# Altium PCB PCB.PcbDoc (part 1 of 11)
Units mm, origin at the board's own origin, x right, y up, seen from the top; angles counter-clockwise.
Board outline 100.46 x 70.51 mm, 10 copper layers (L1(SIG), L2(GND), L3(PWR), L4(SIG), L5(GND), L6(SIG), L7(GND), L8(SIG), L9(GND), L10(SIG)), stack 1.49 mm thick; 425 components, 324 nets, 2004 pads, 1425 vias.
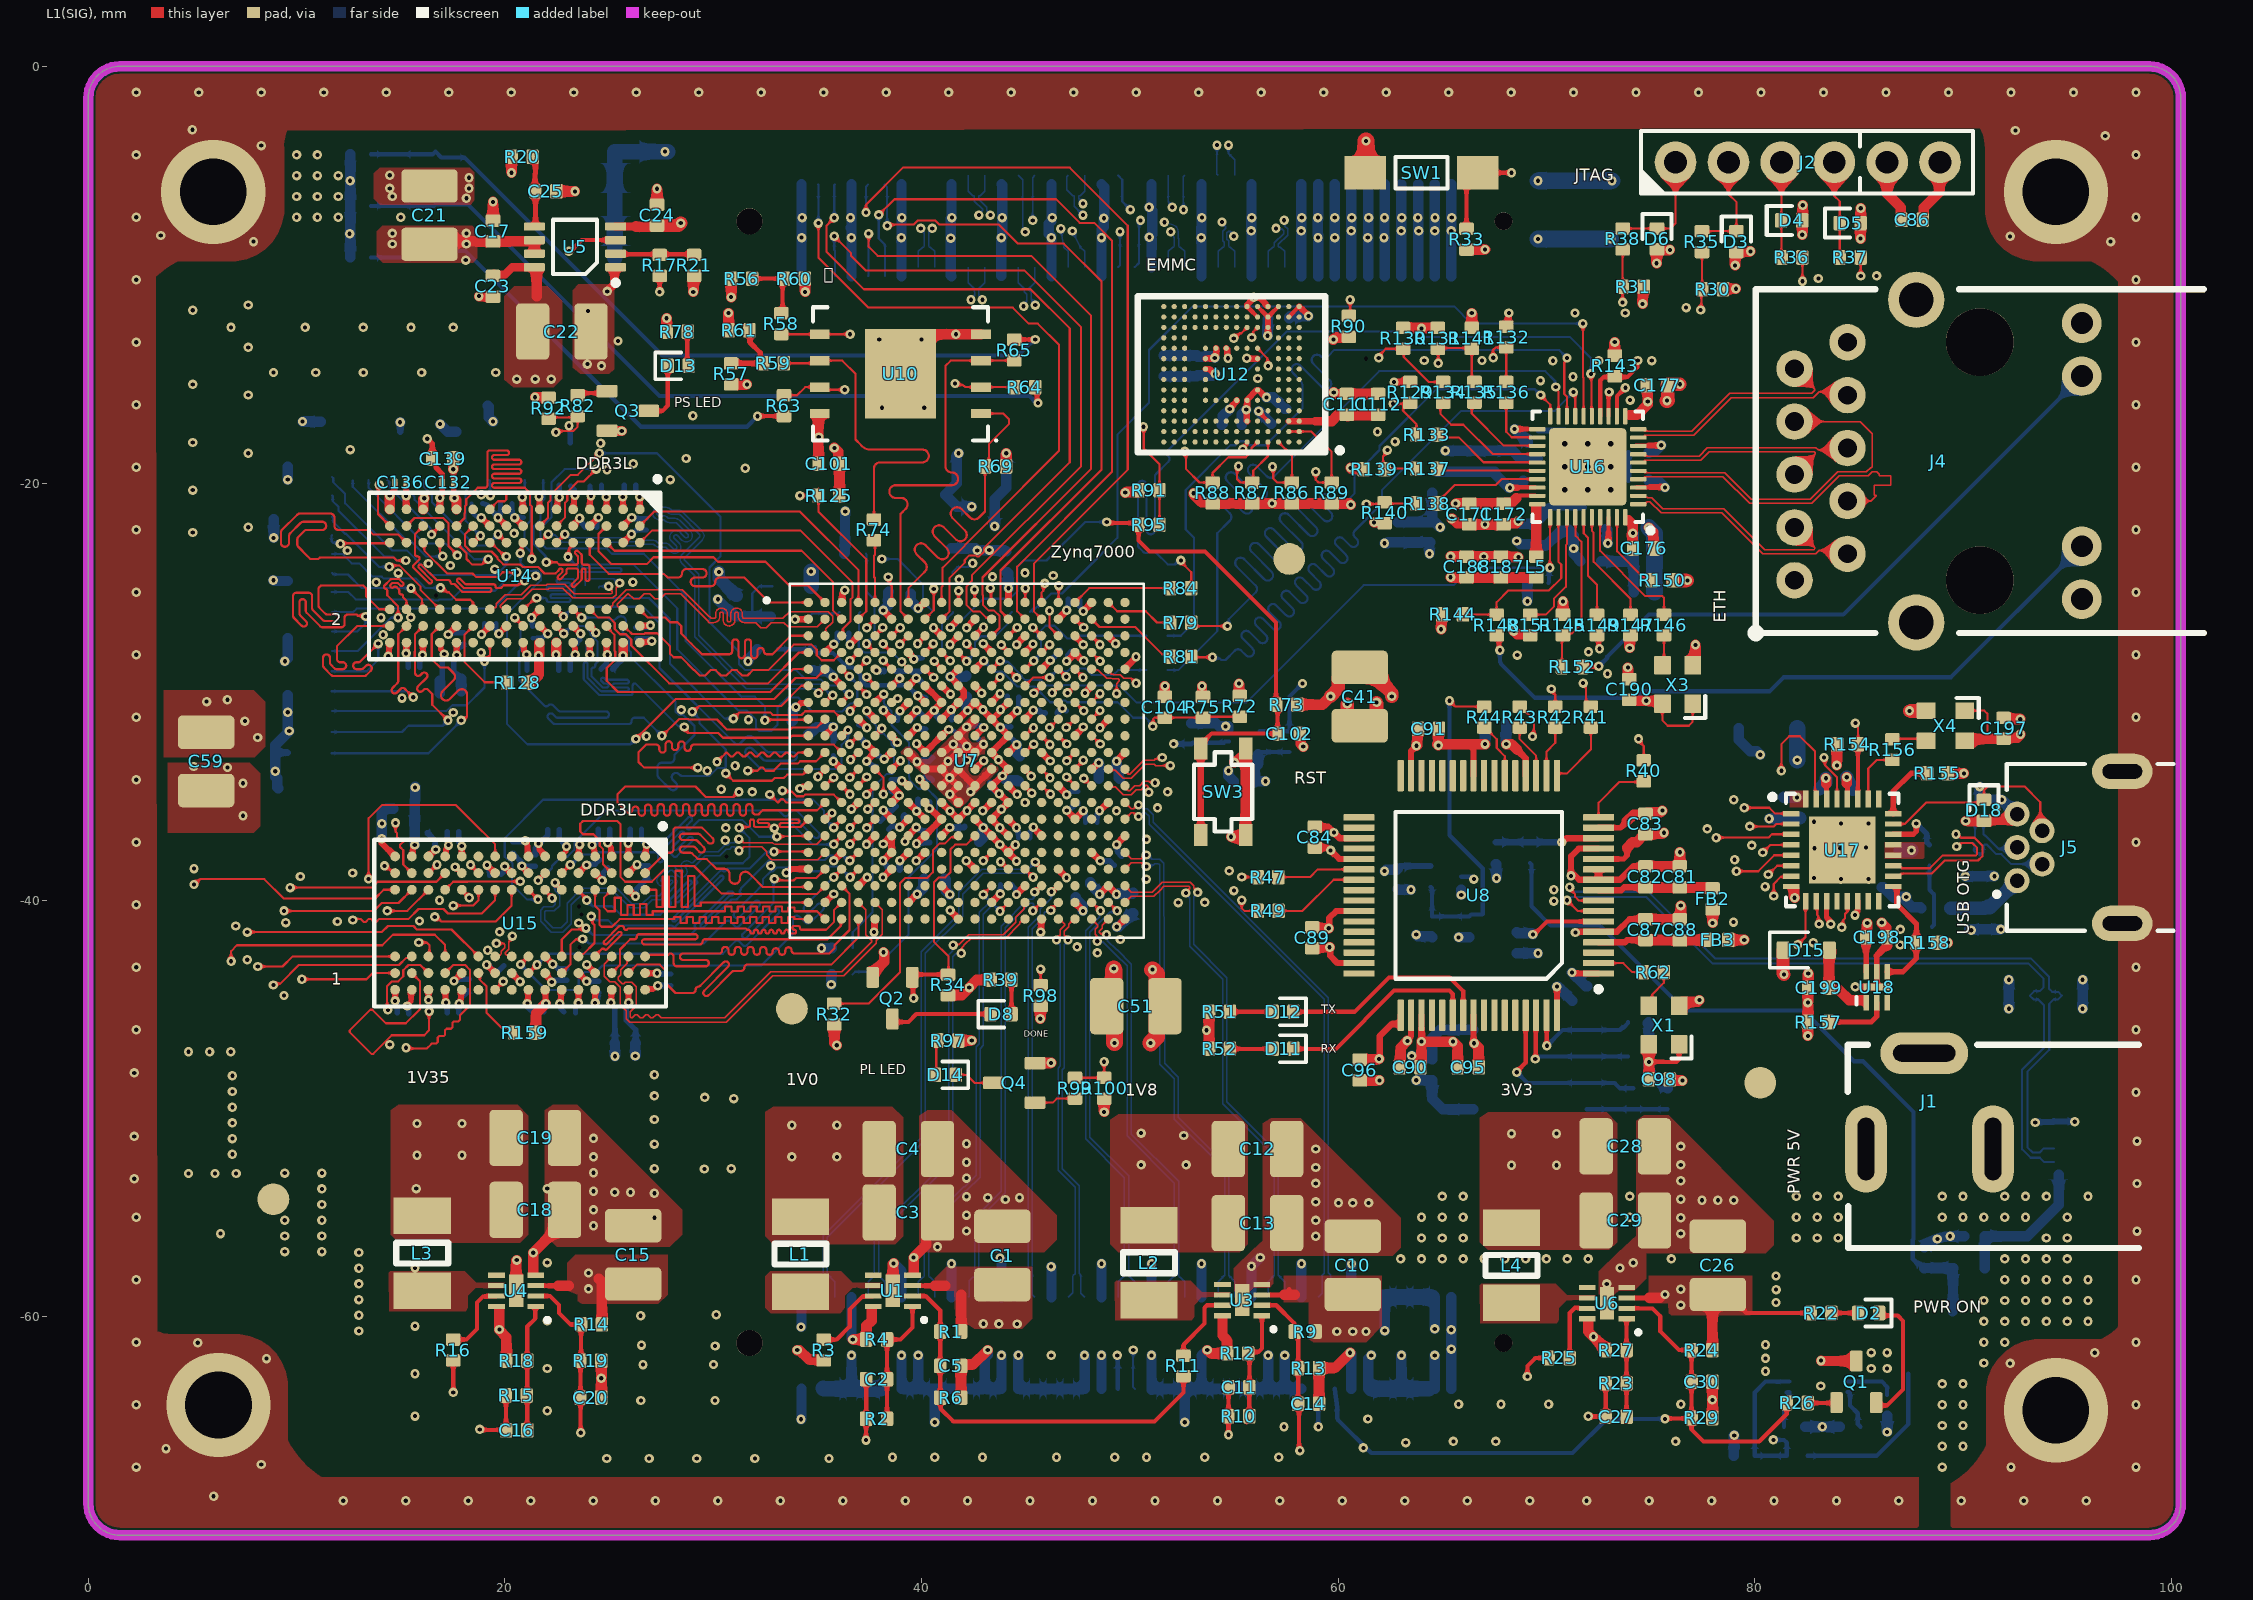
[diagram p0: L1(SIG) view]
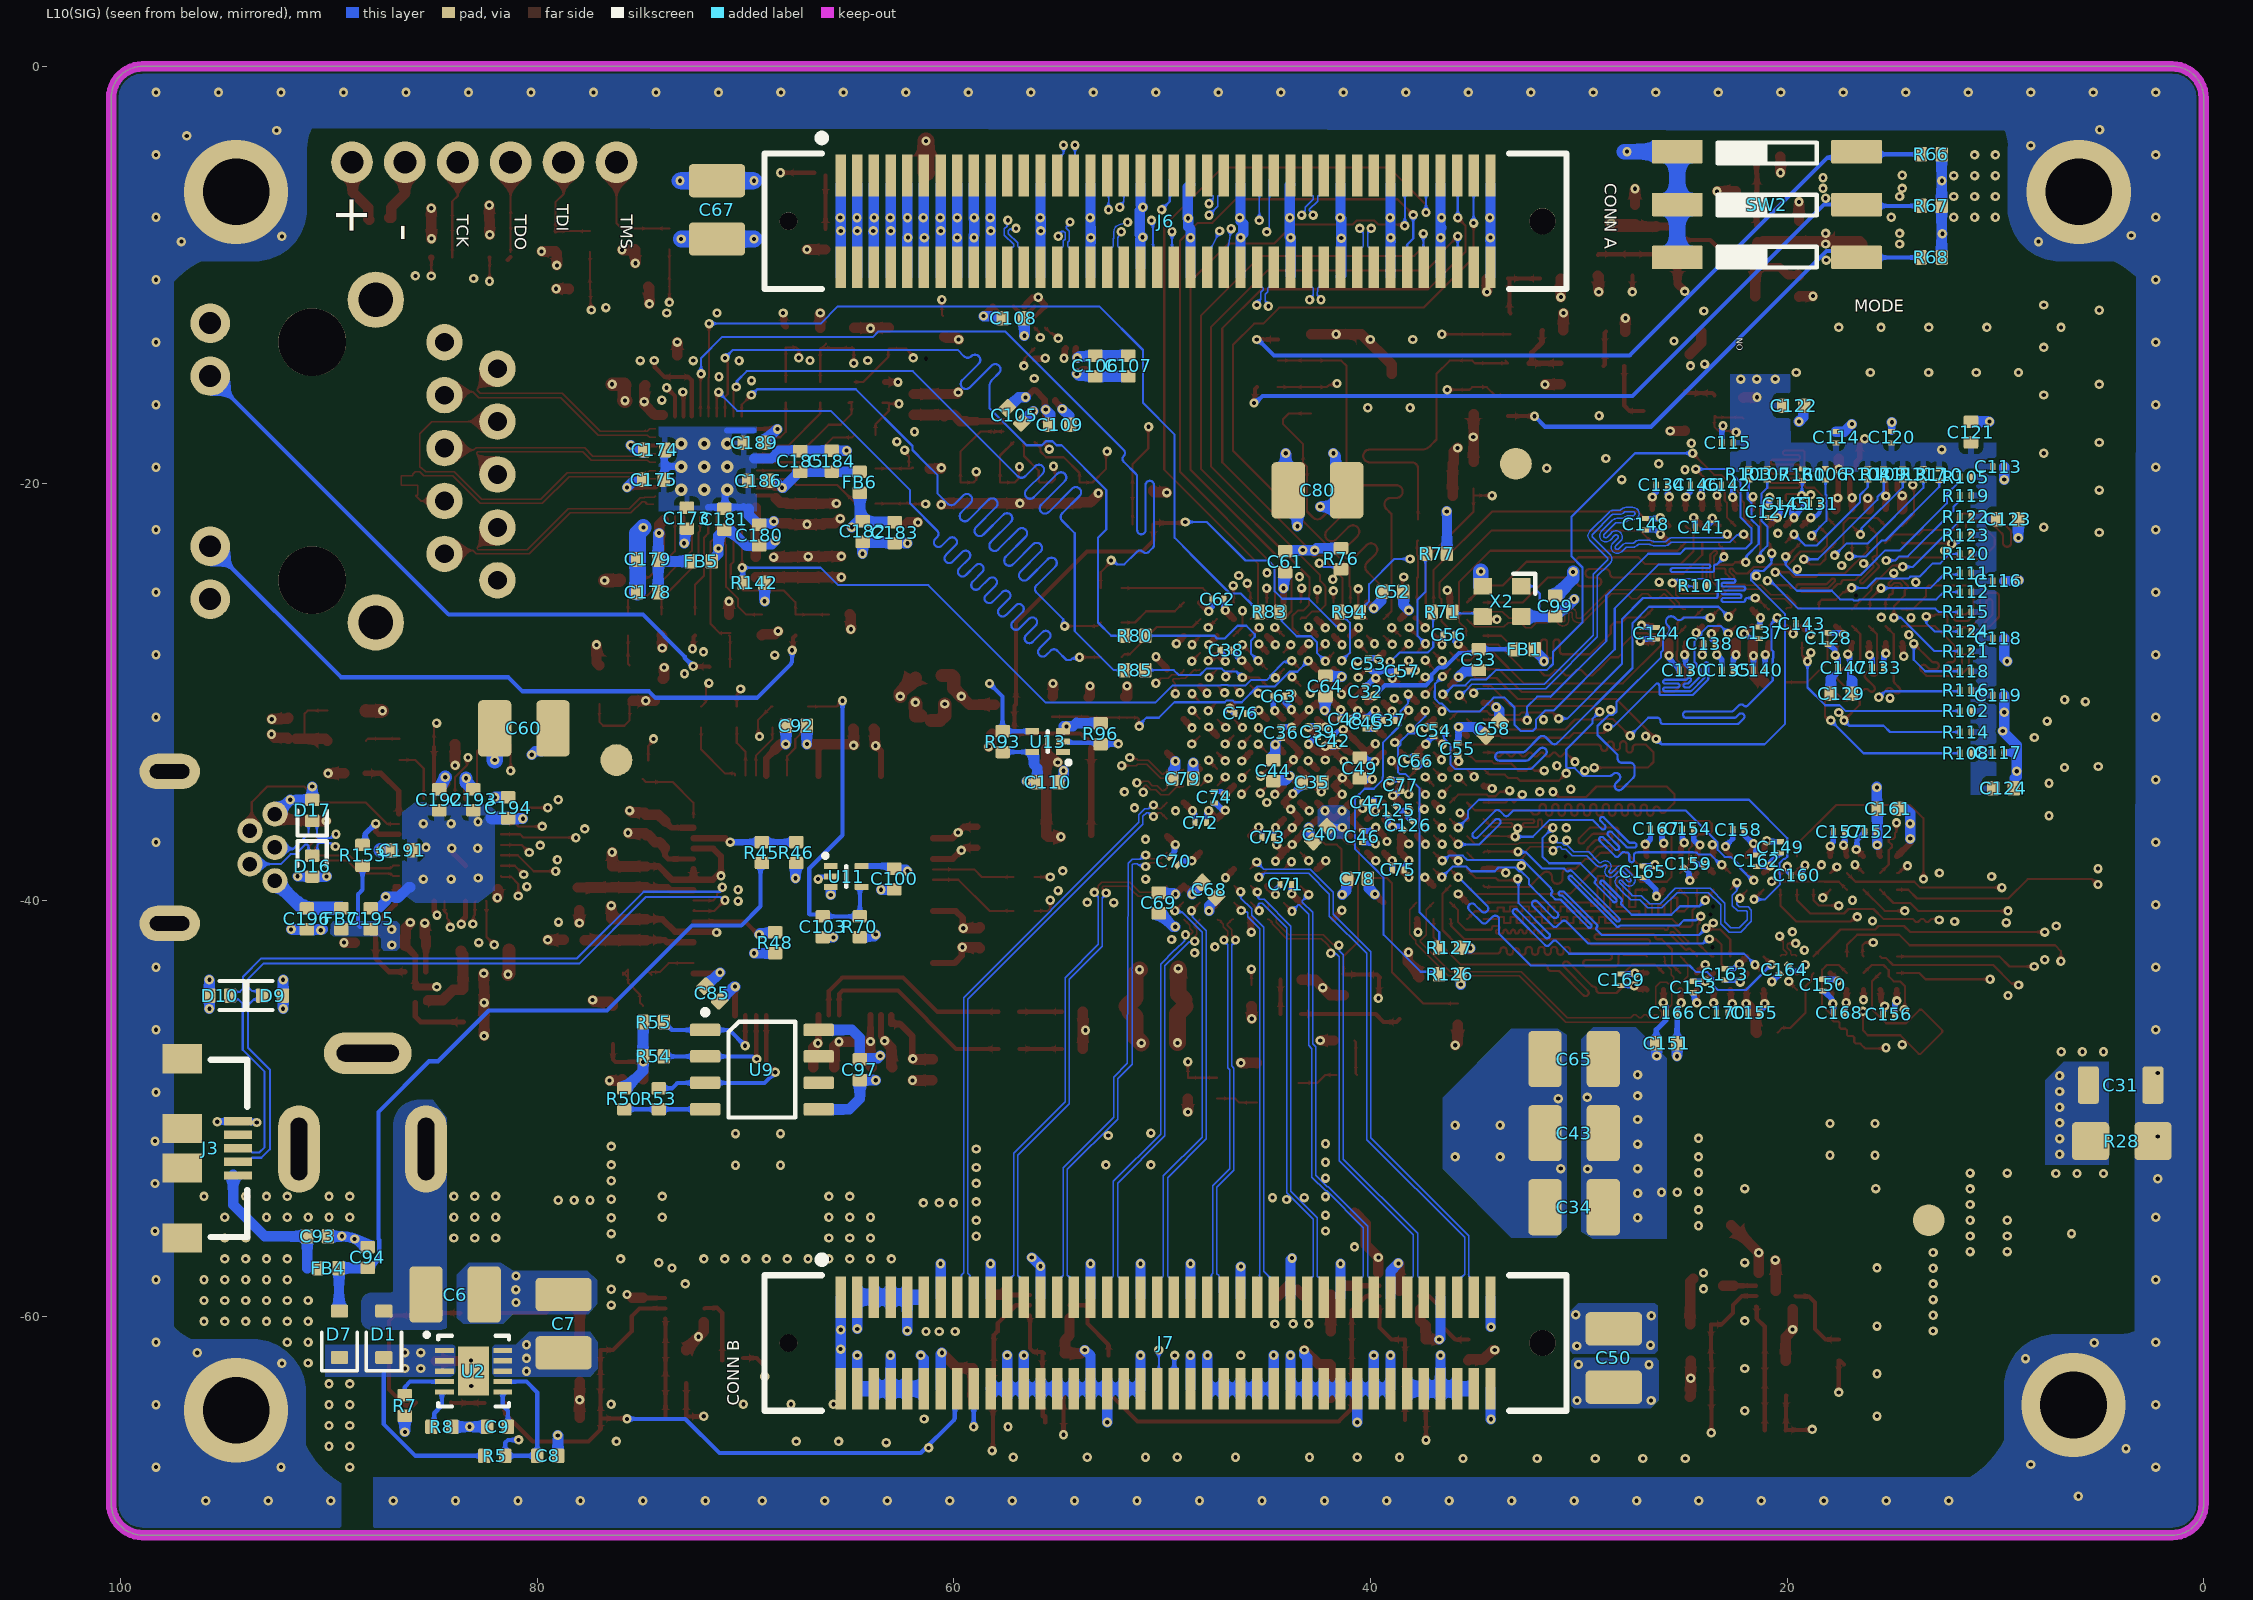
[diagram p1: L10(SIG) view, seen from below]
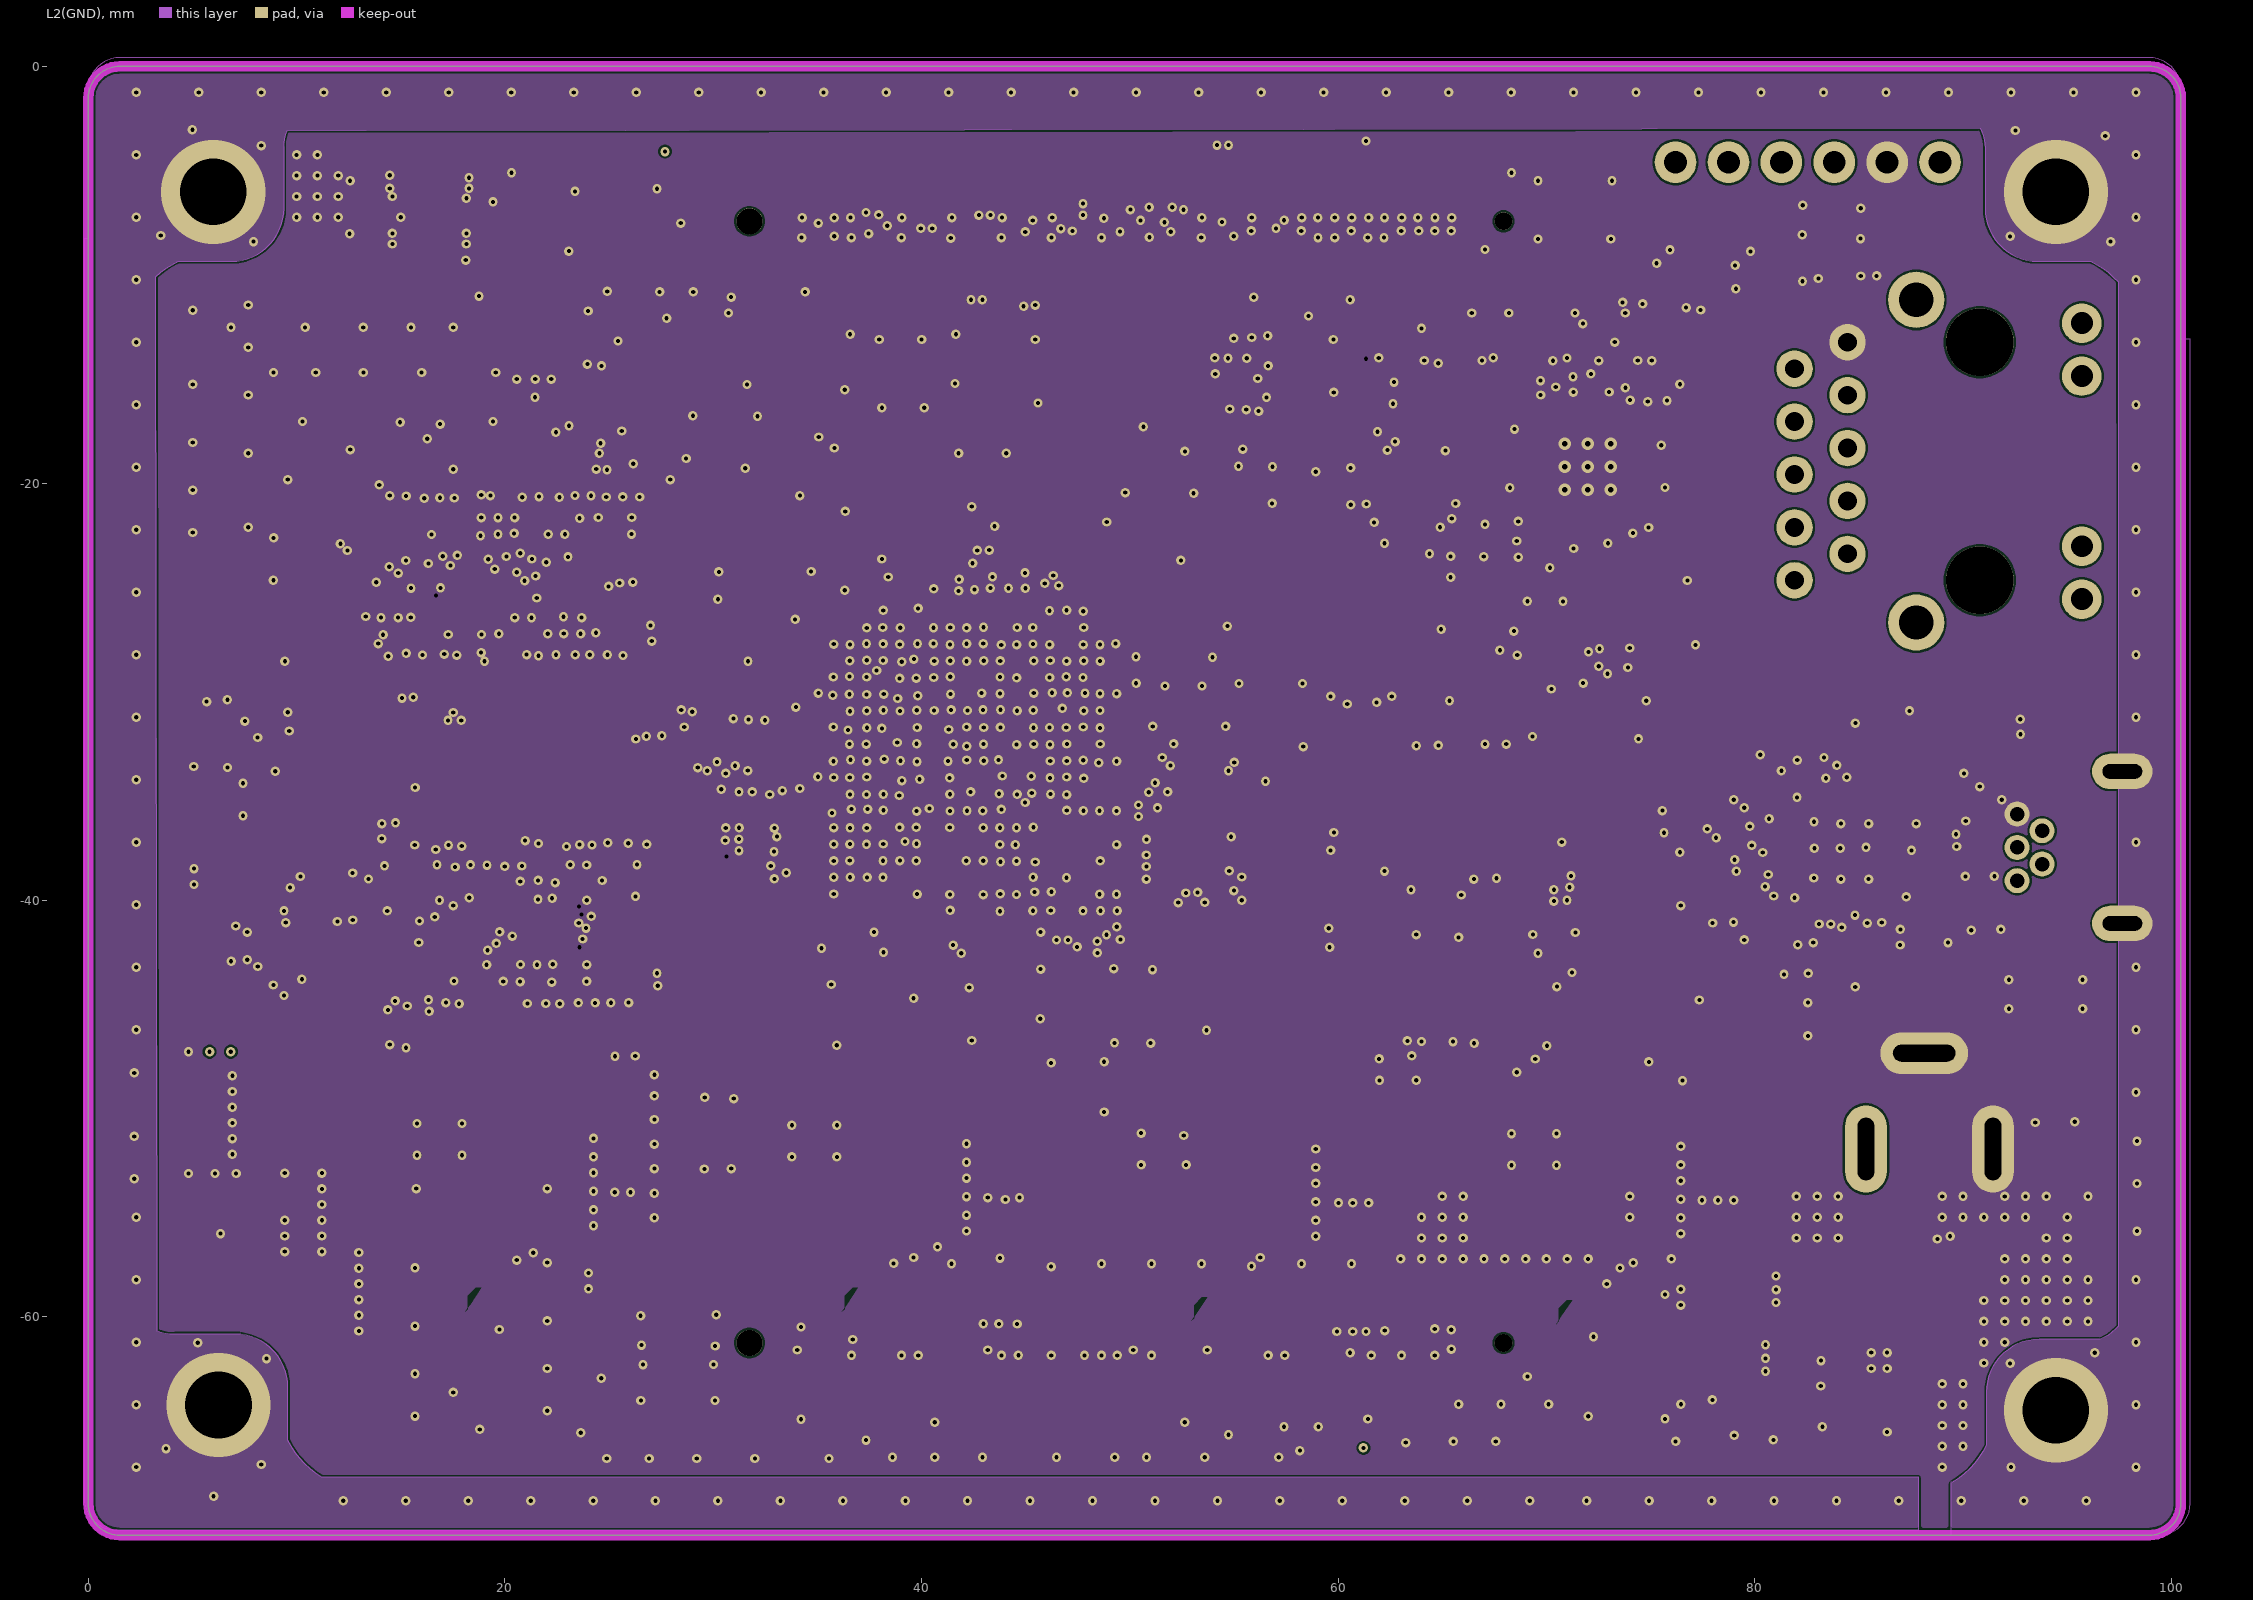
[diagram p2: L2(GND)]
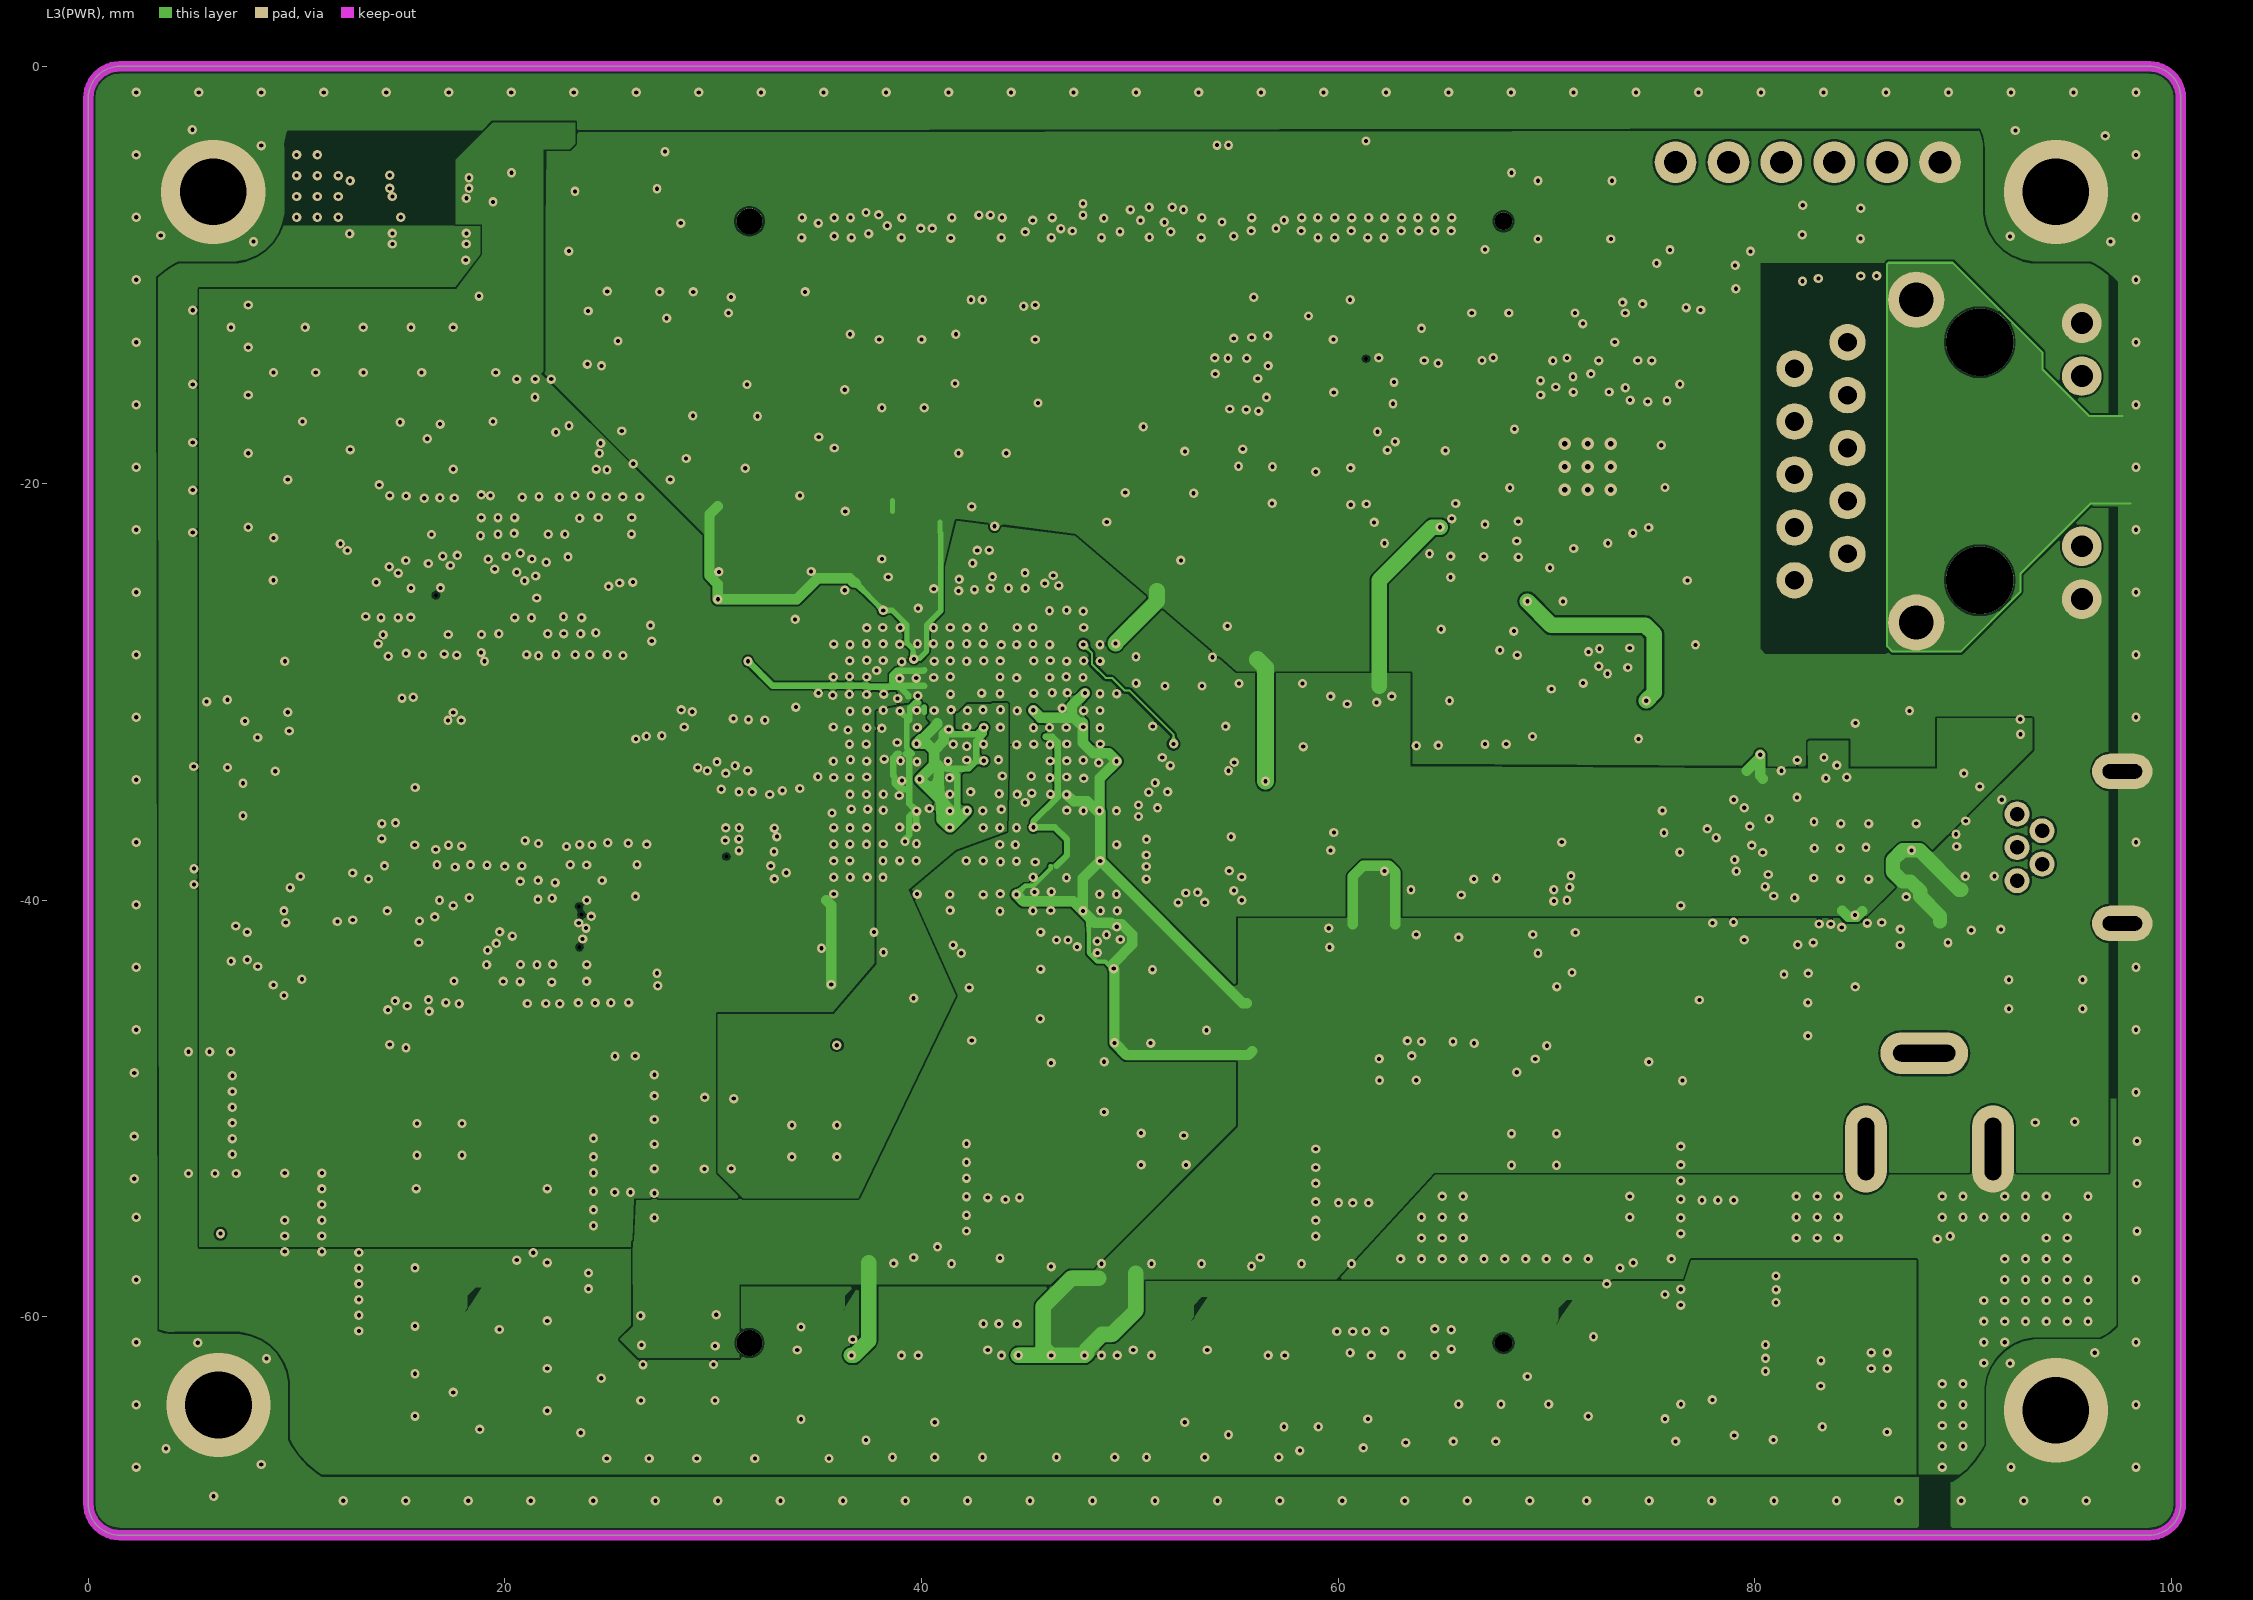
[diagram p3: L3(PWR)]
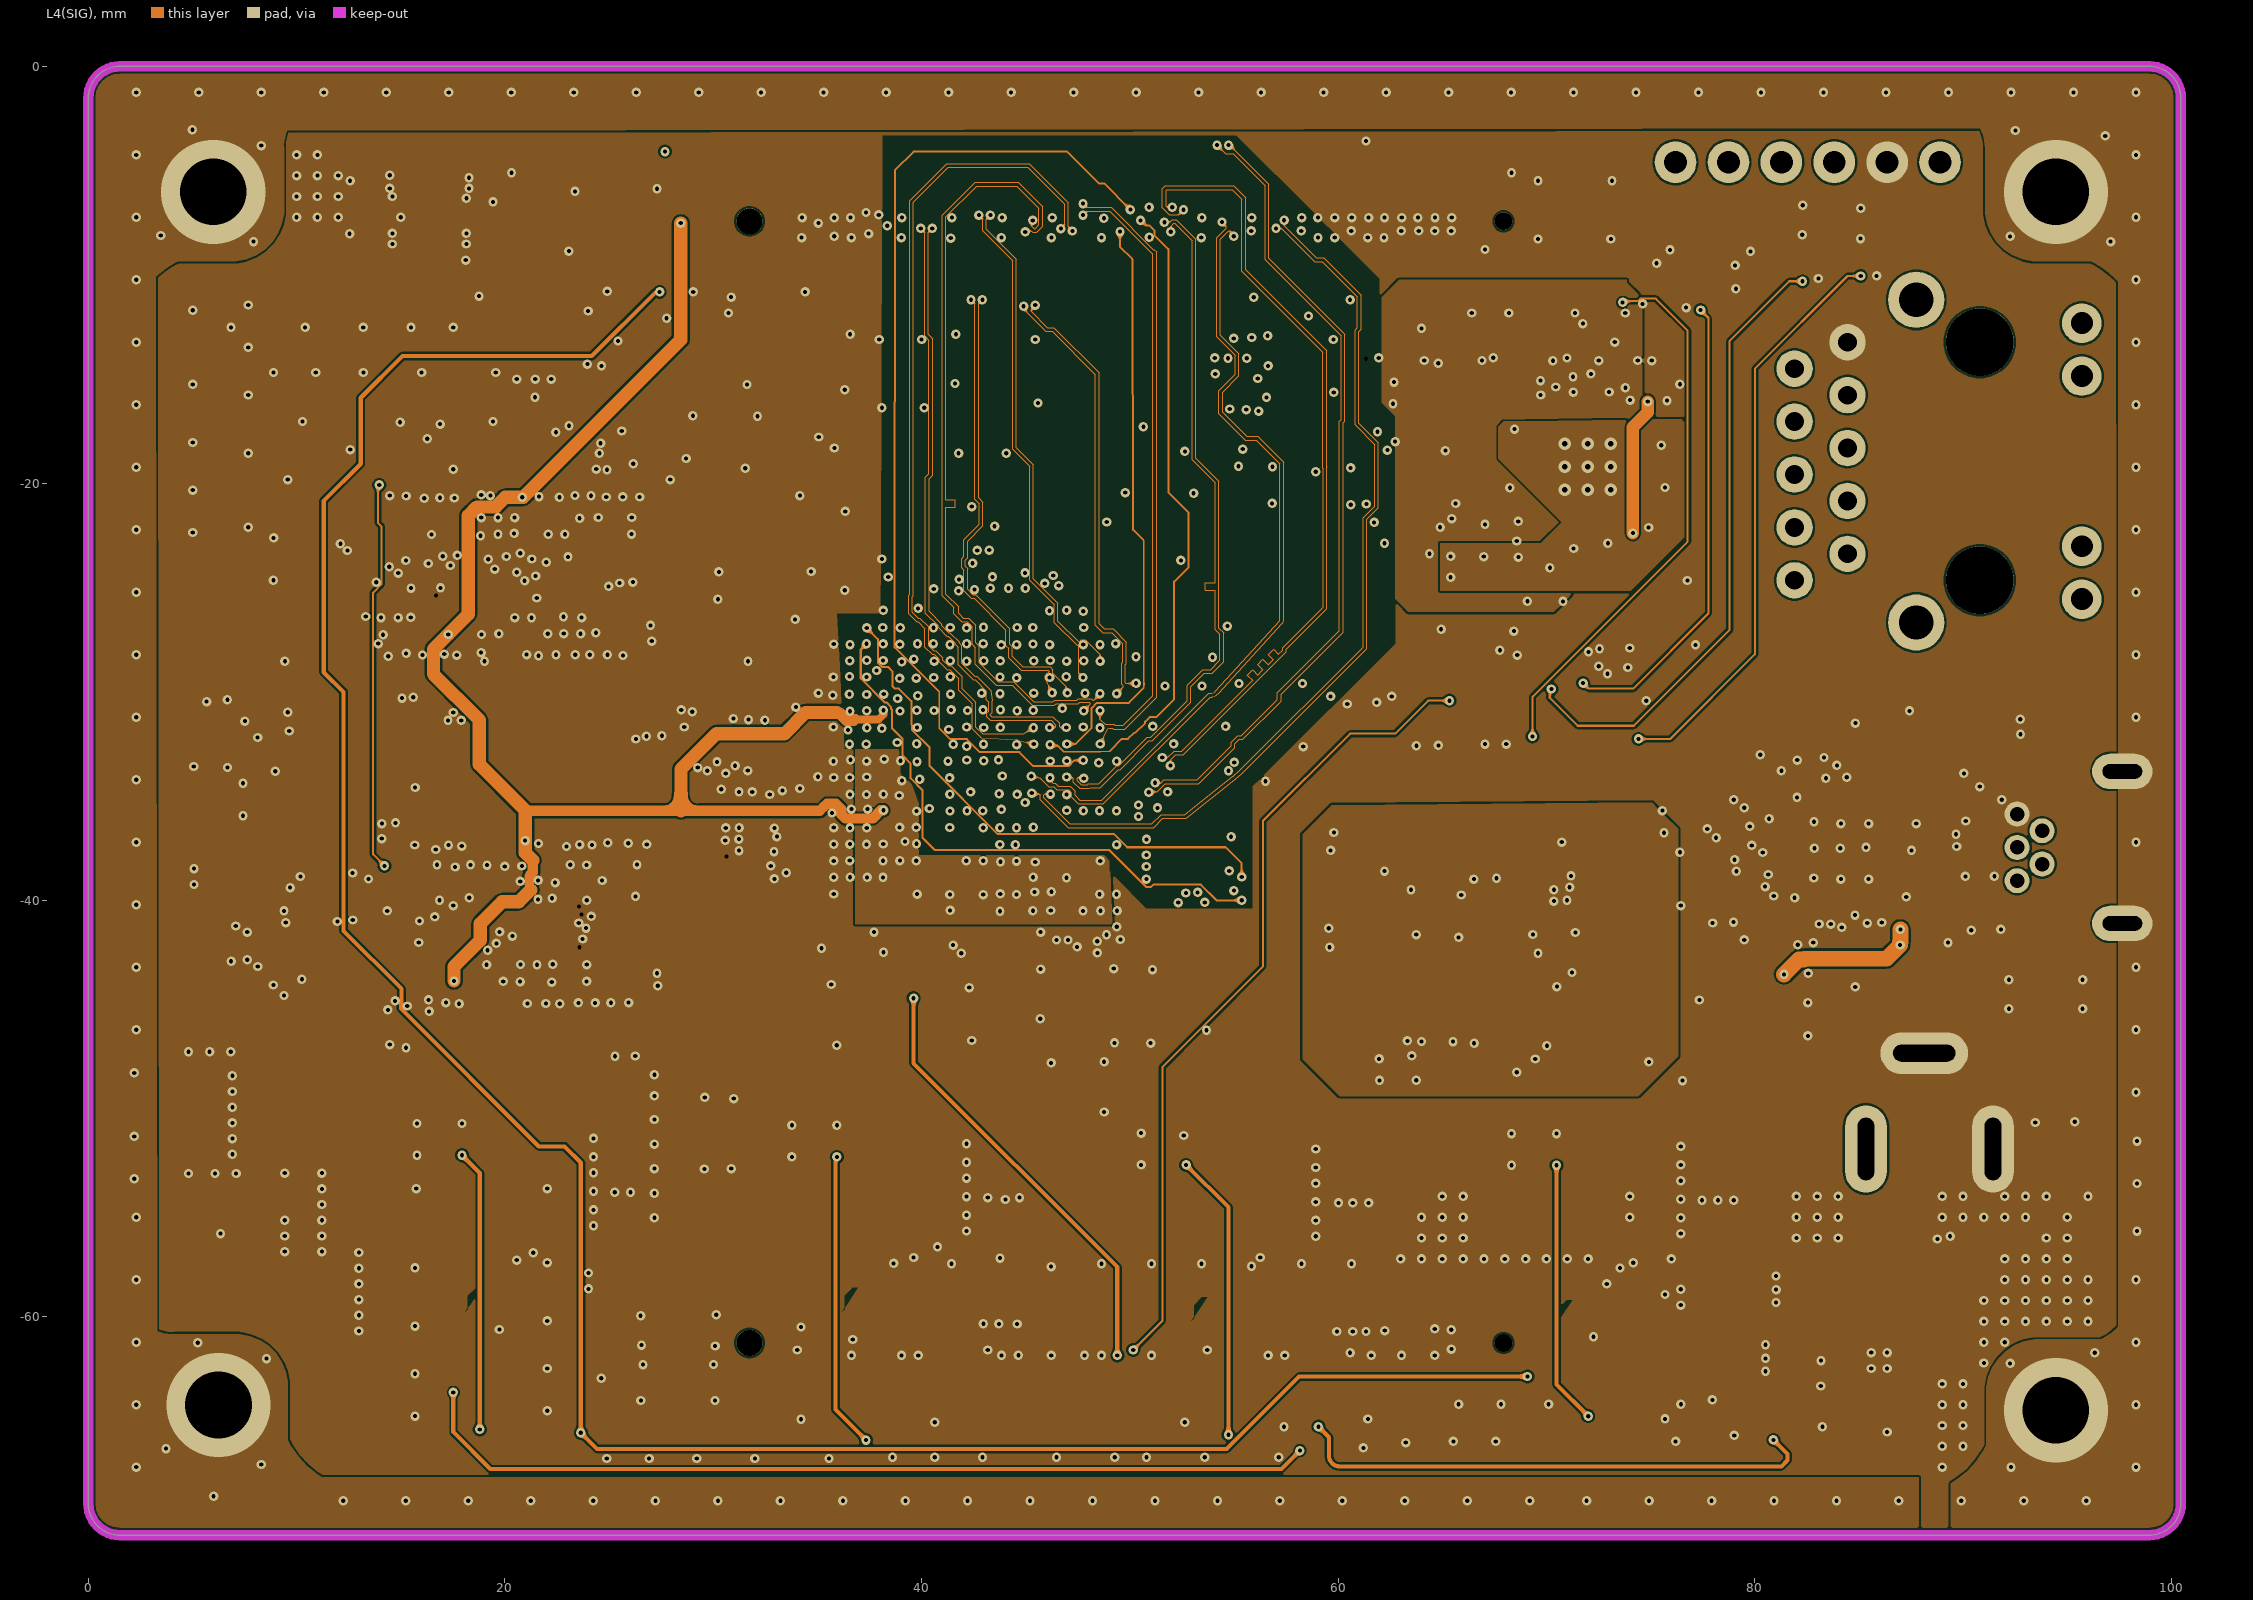
[diagram p4: L4(SIG)]
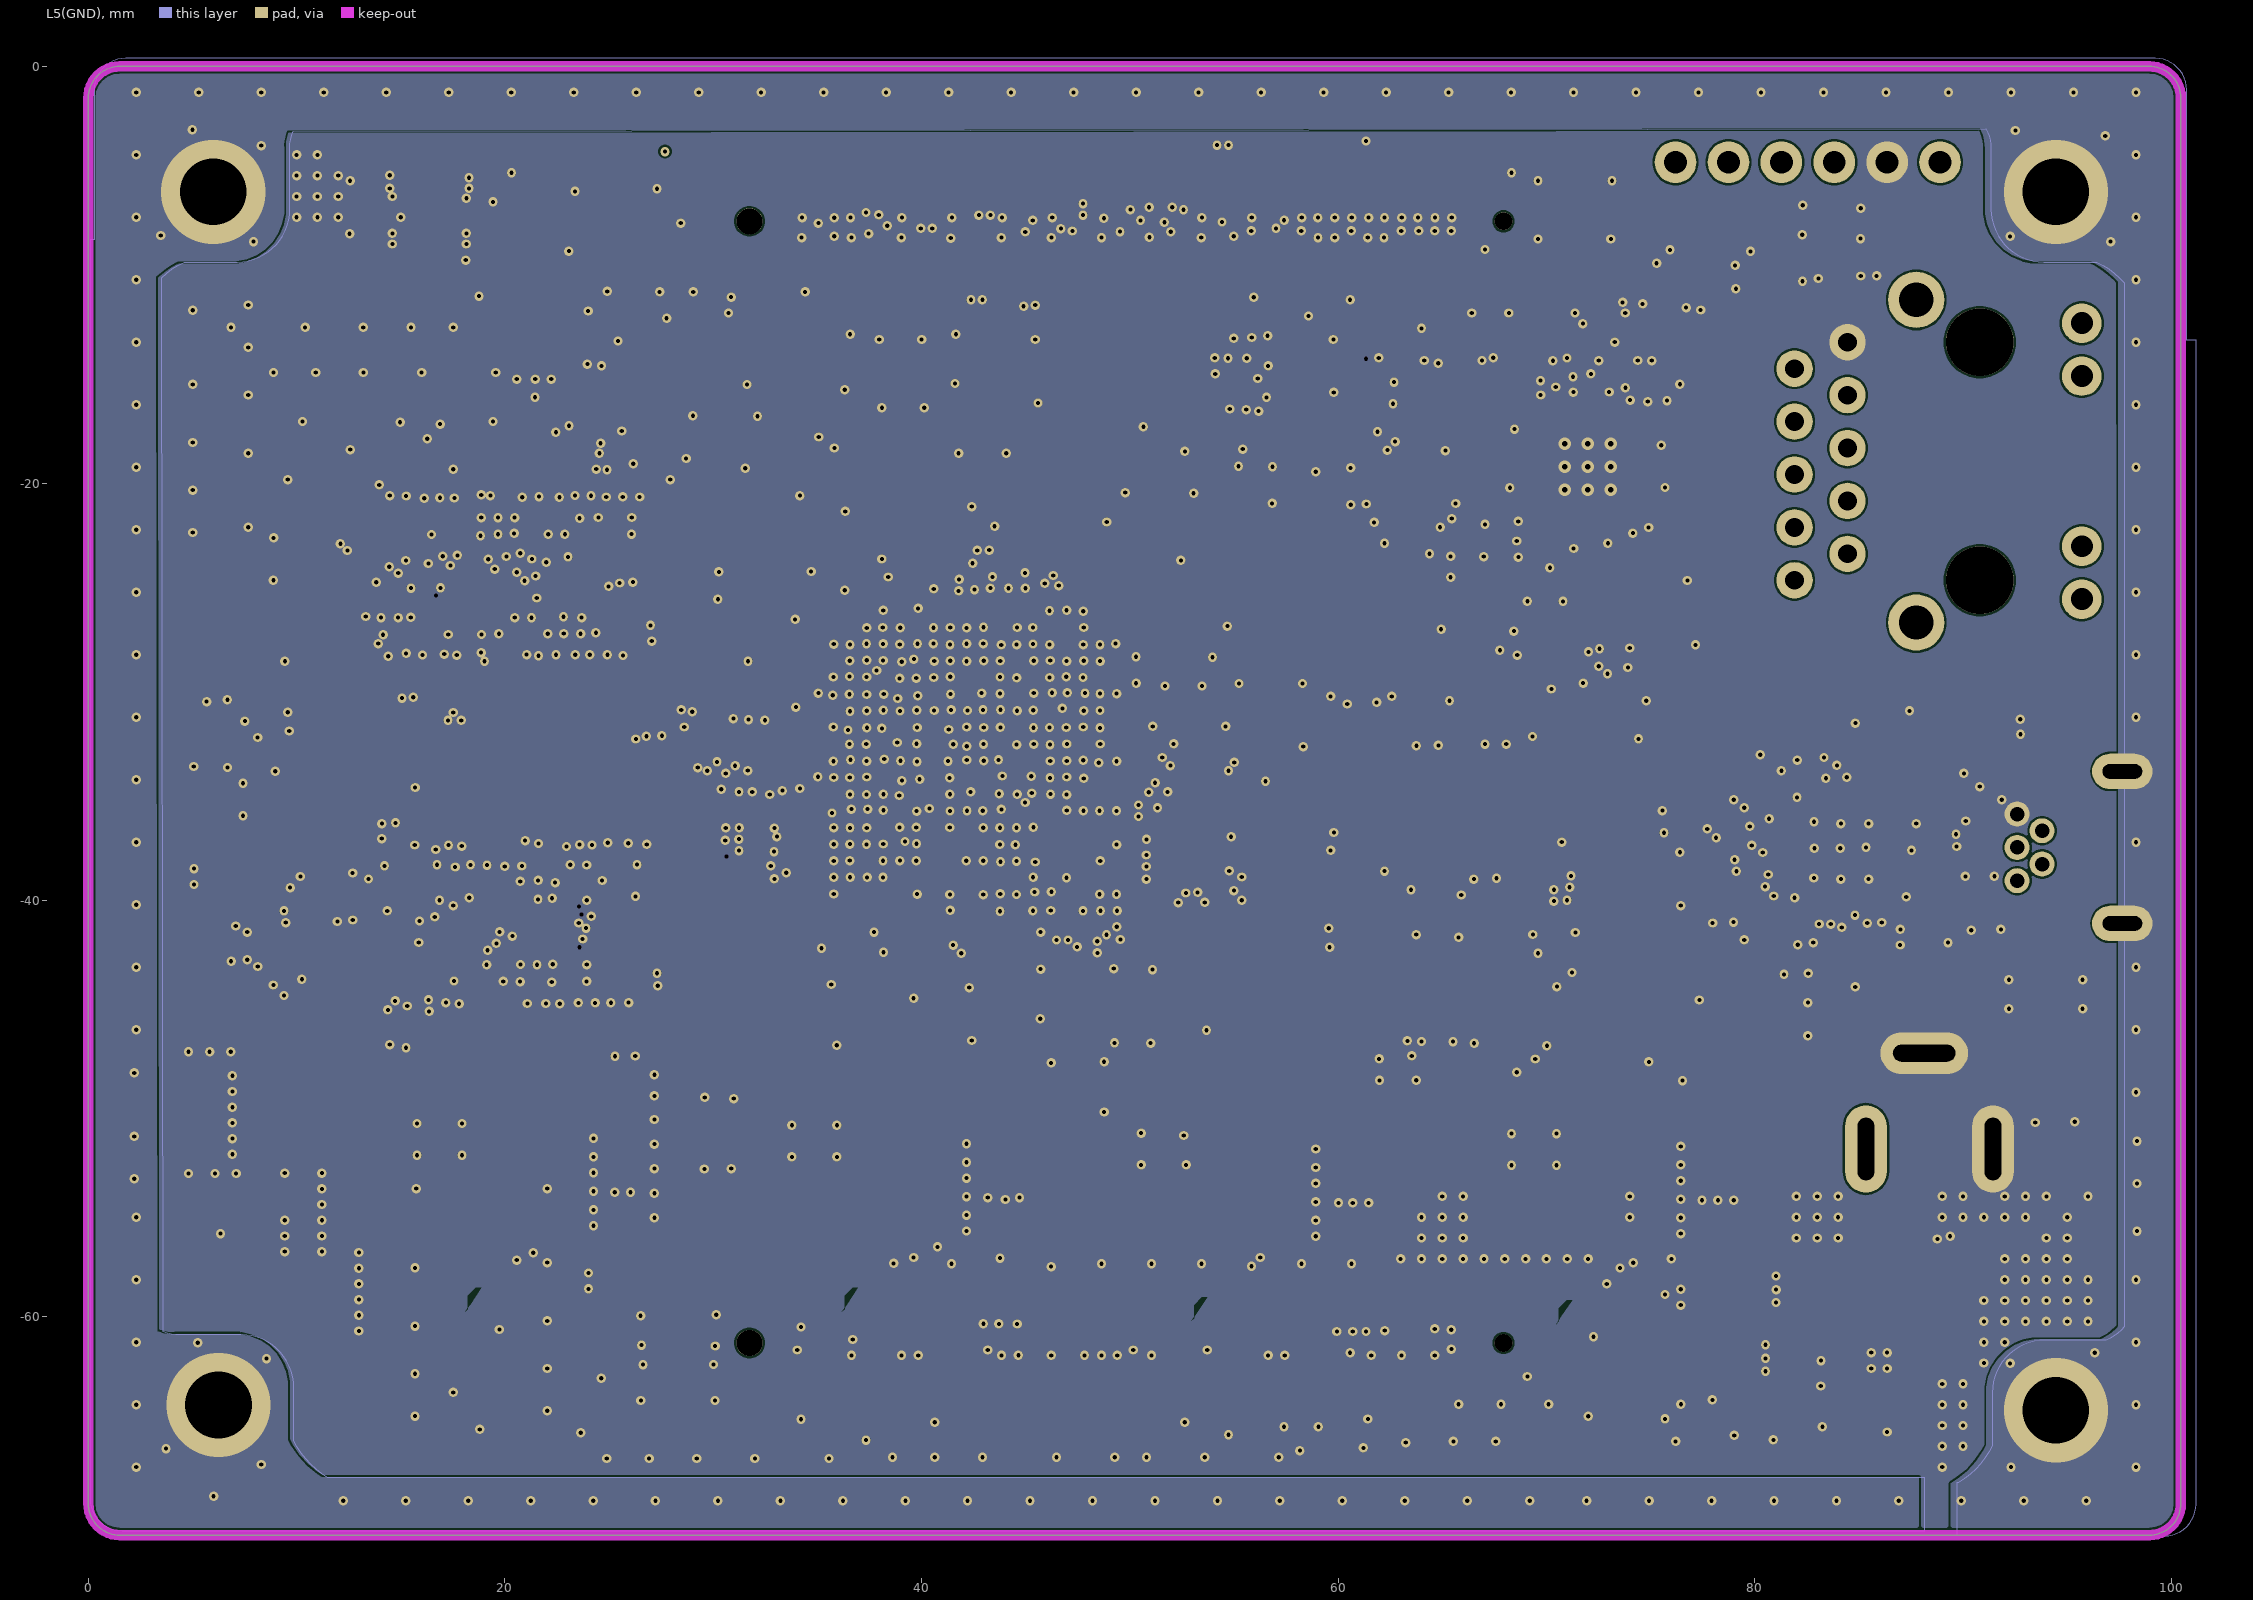
[diagram p5: L5(GND)]
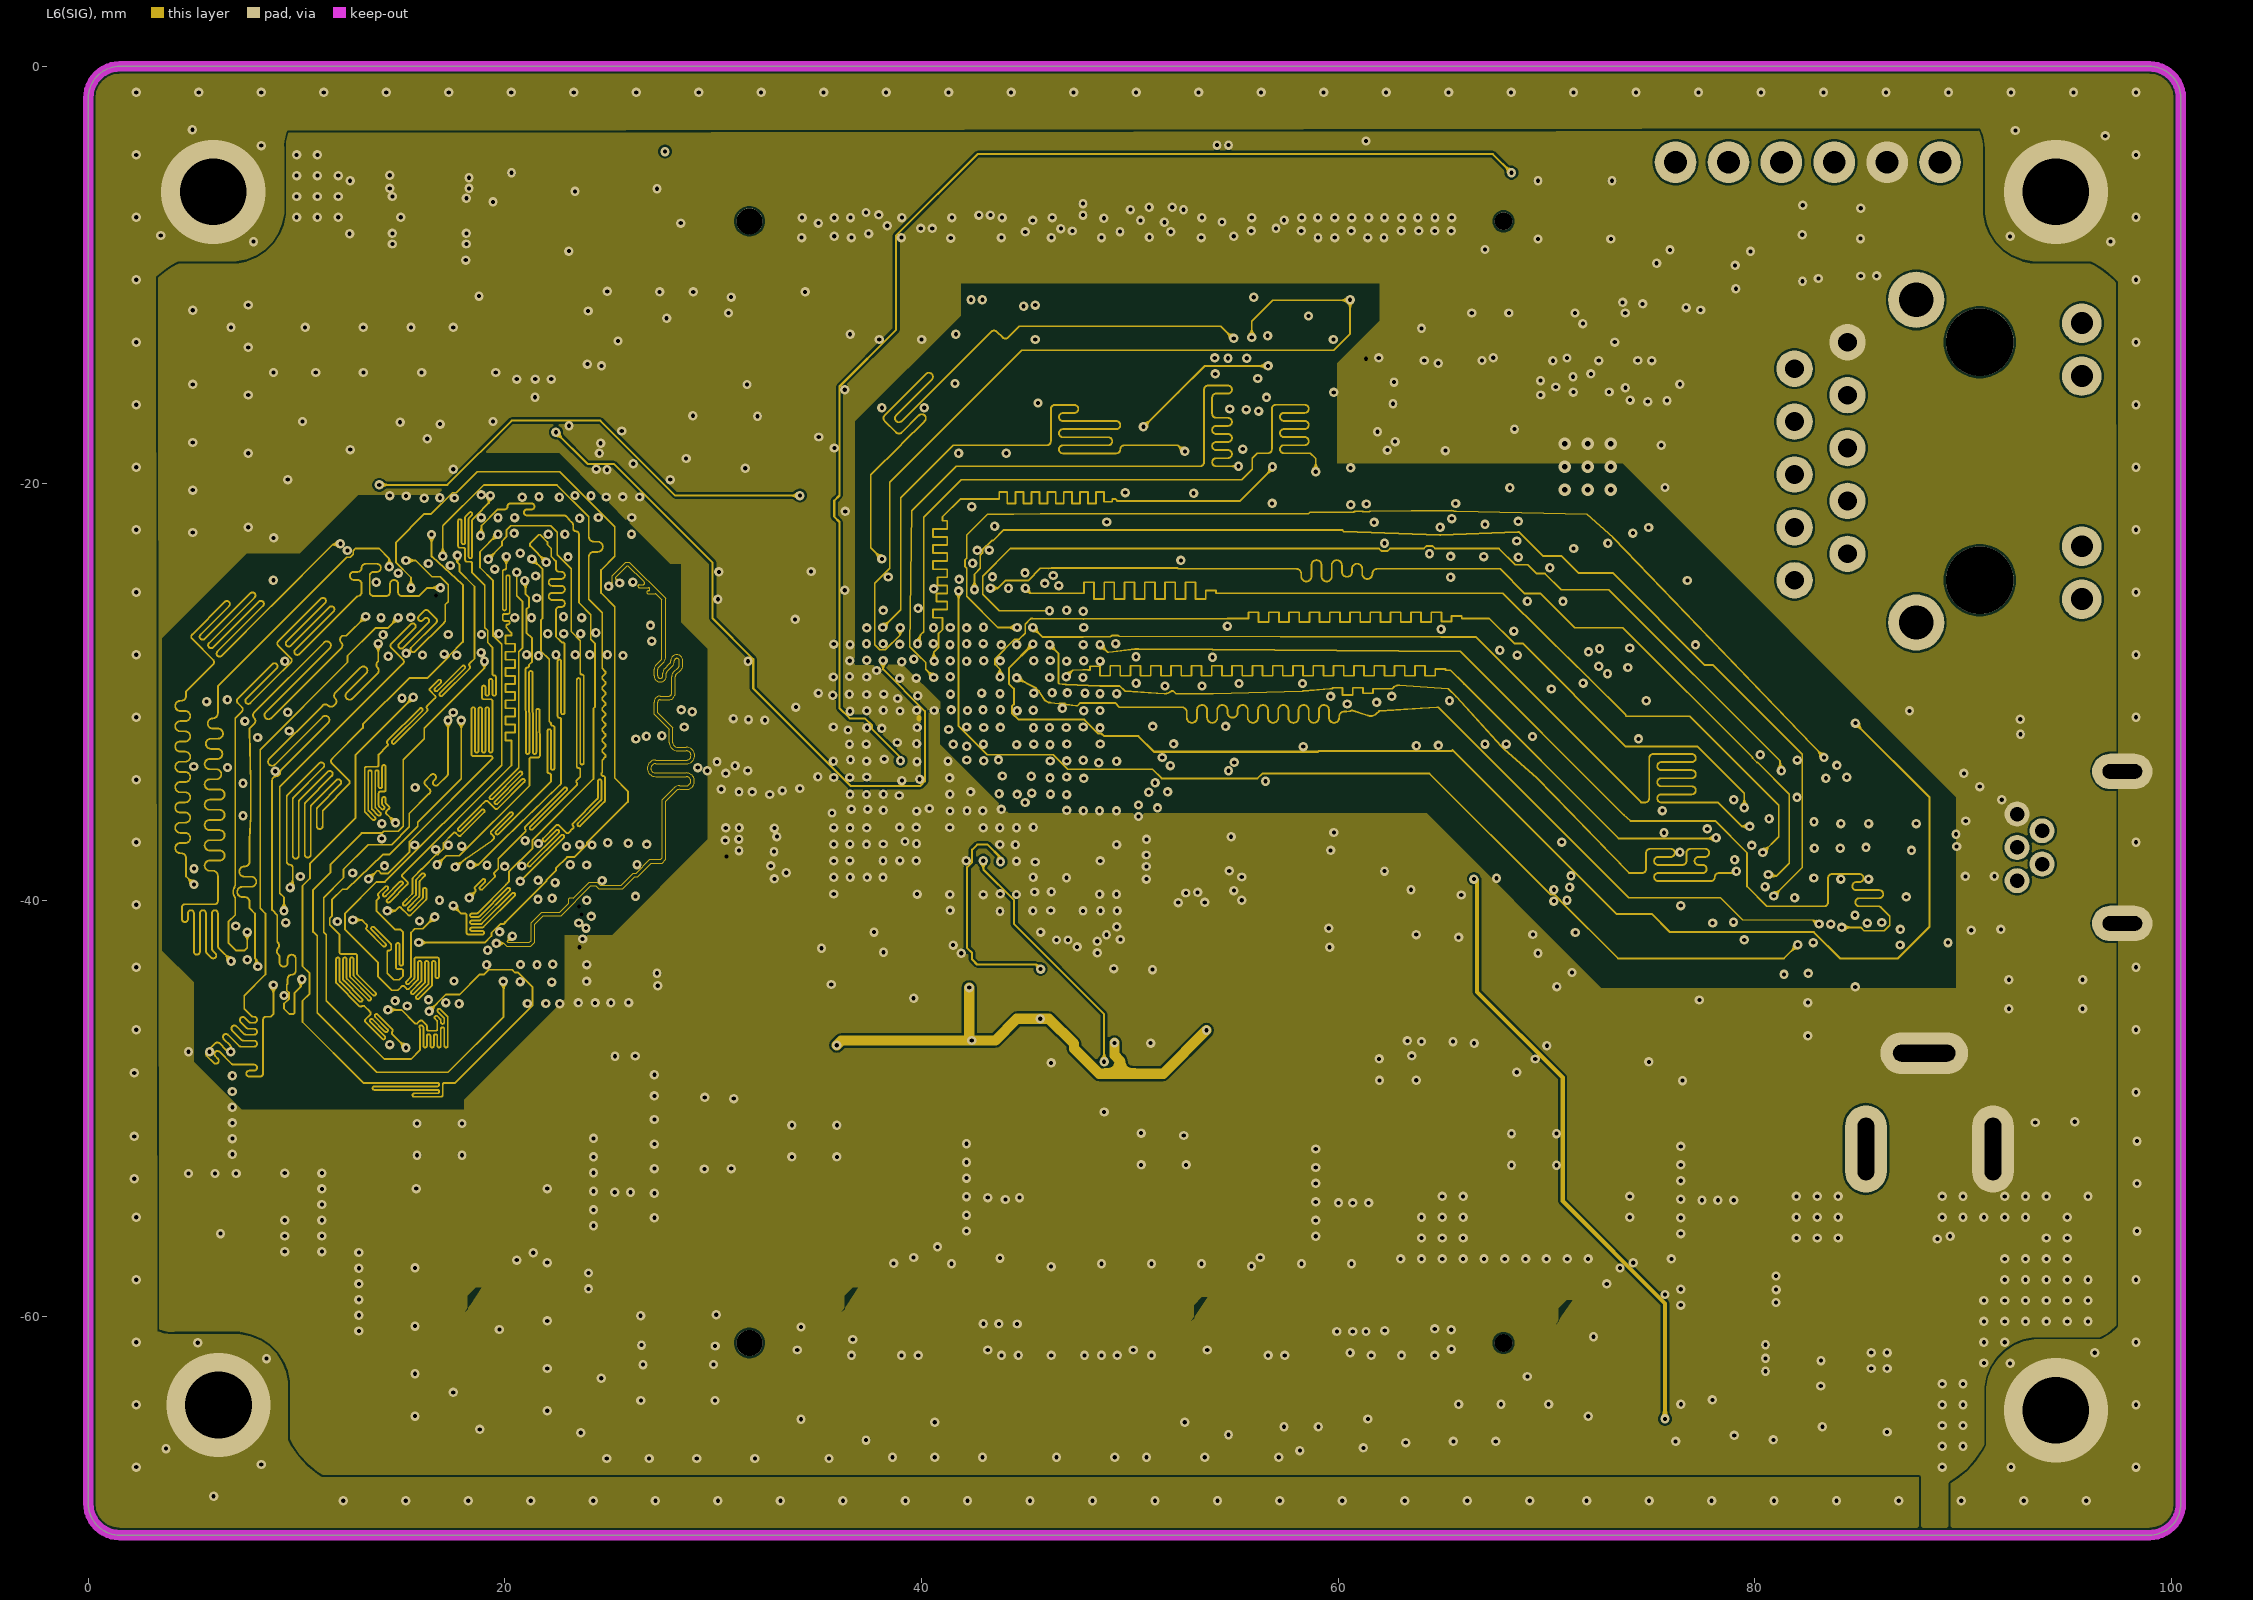
[diagram p6: L6(SIG)]
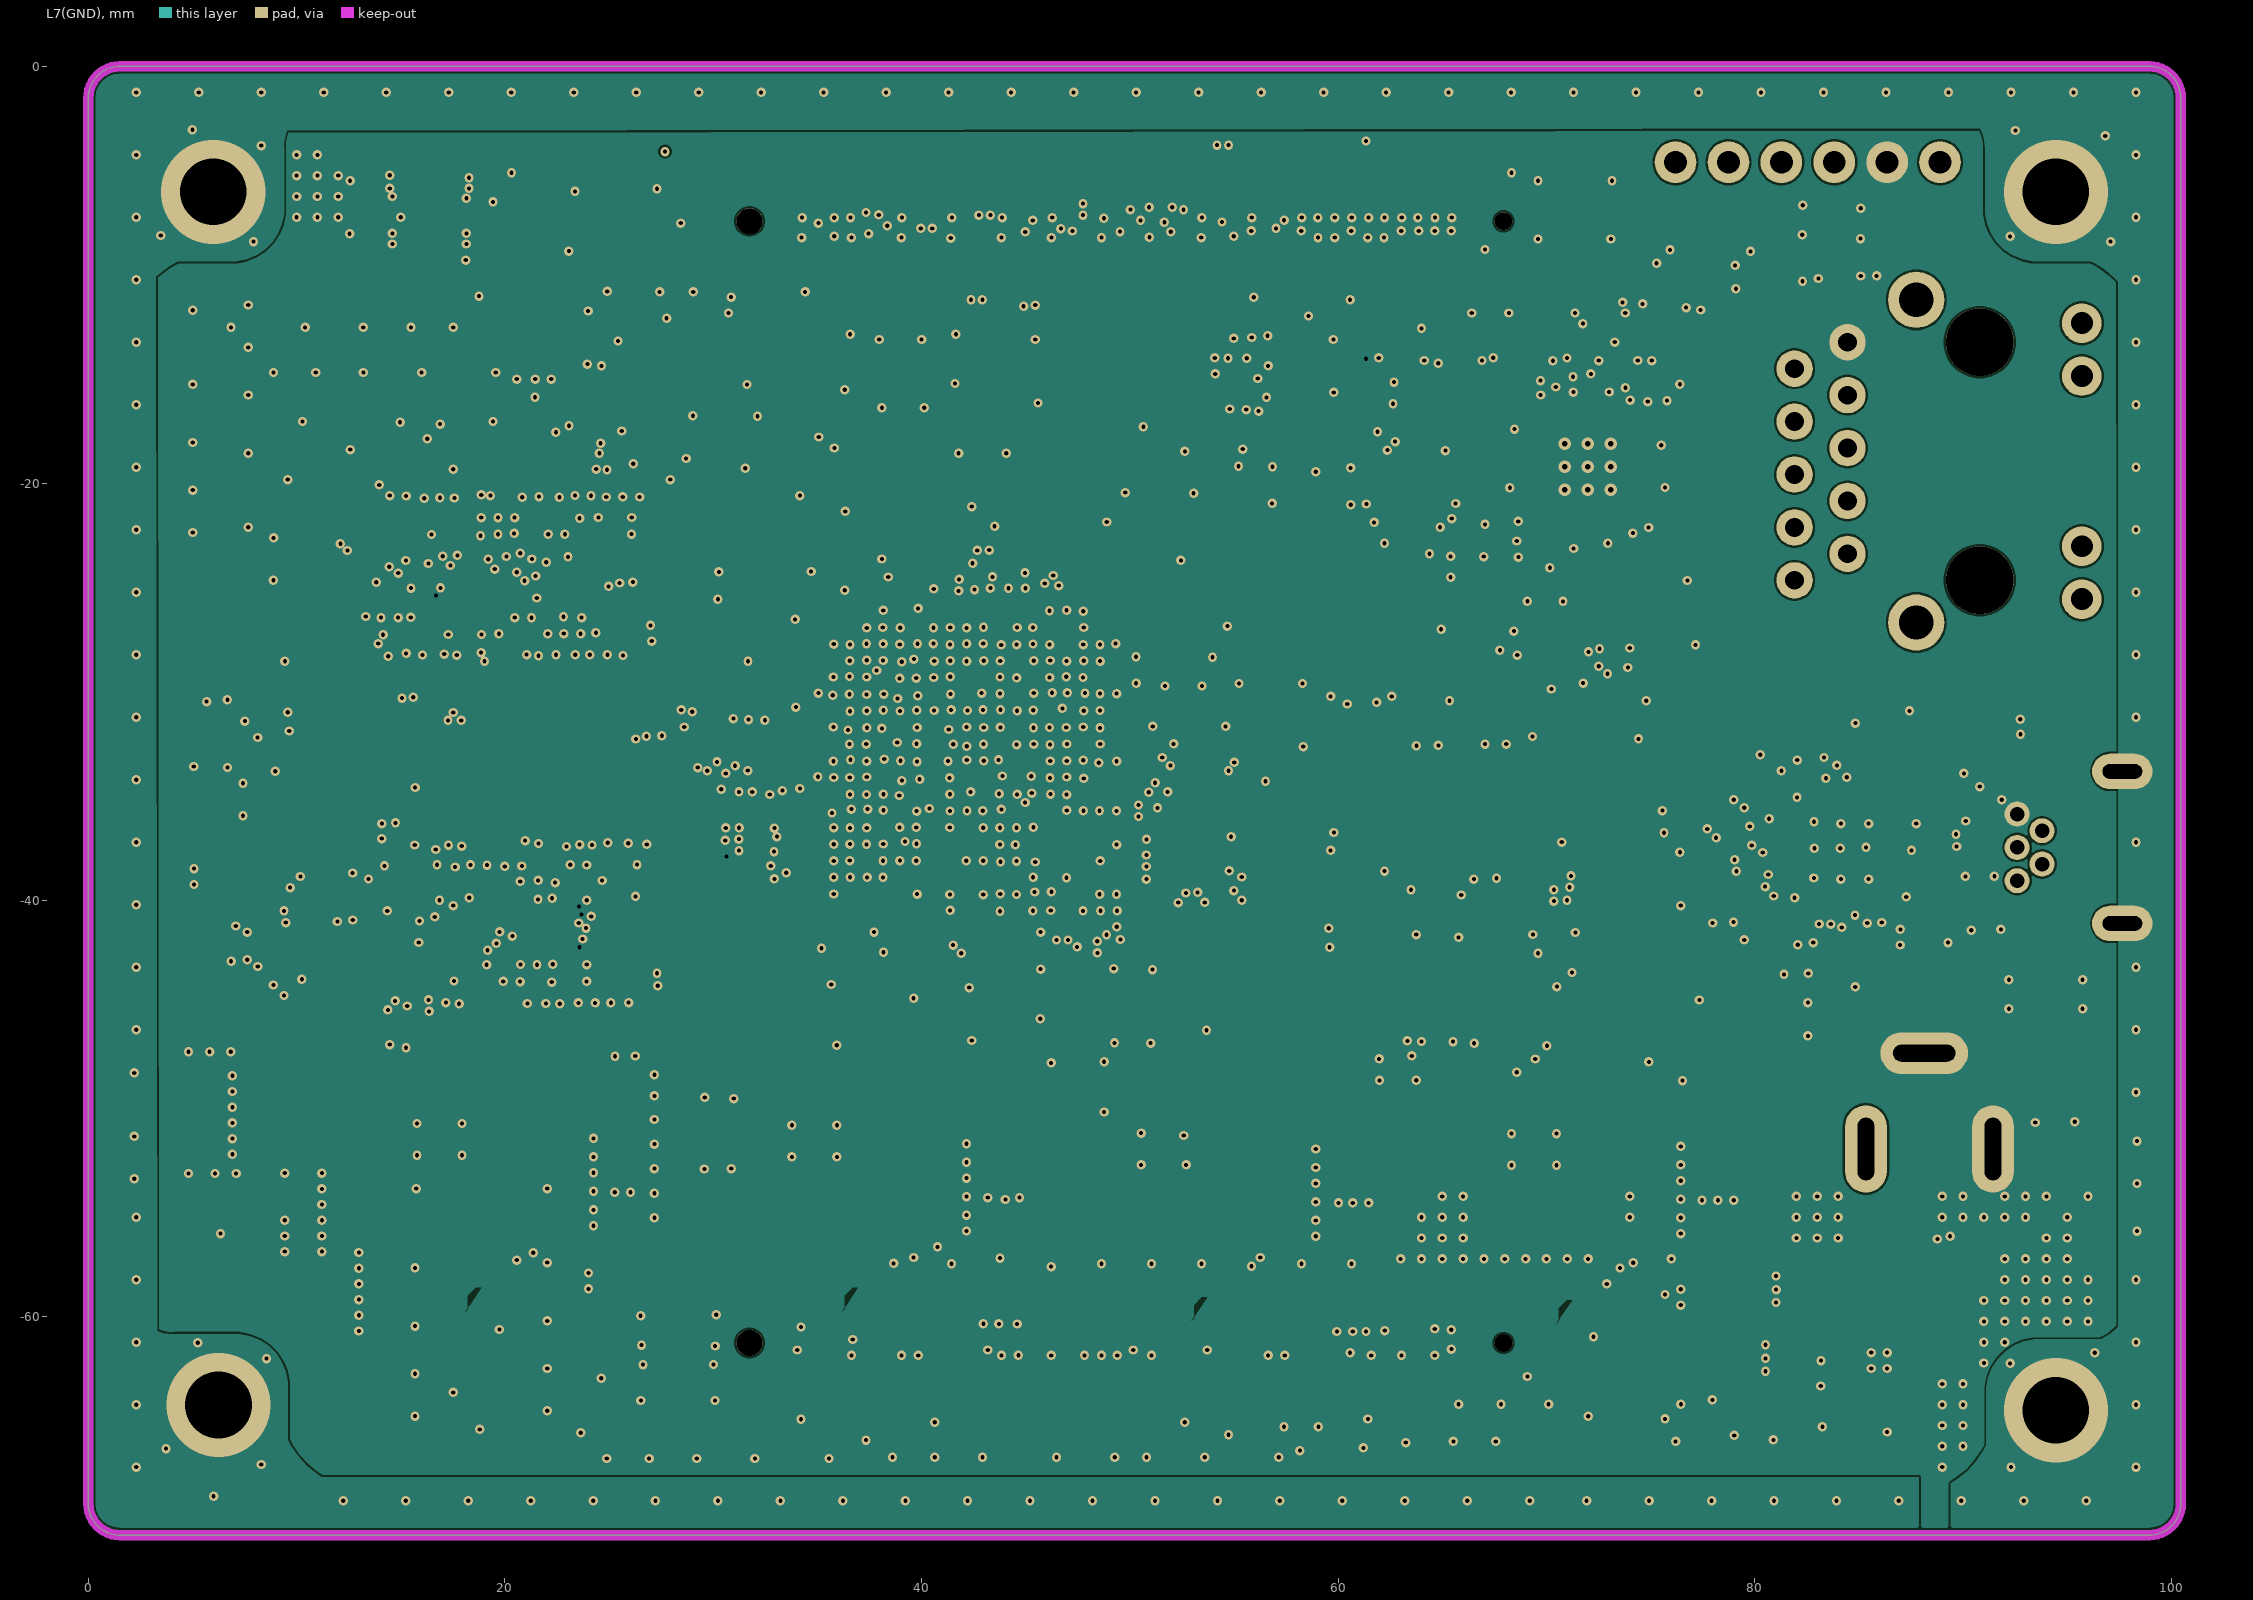
[diagram p7: L7(GND)]
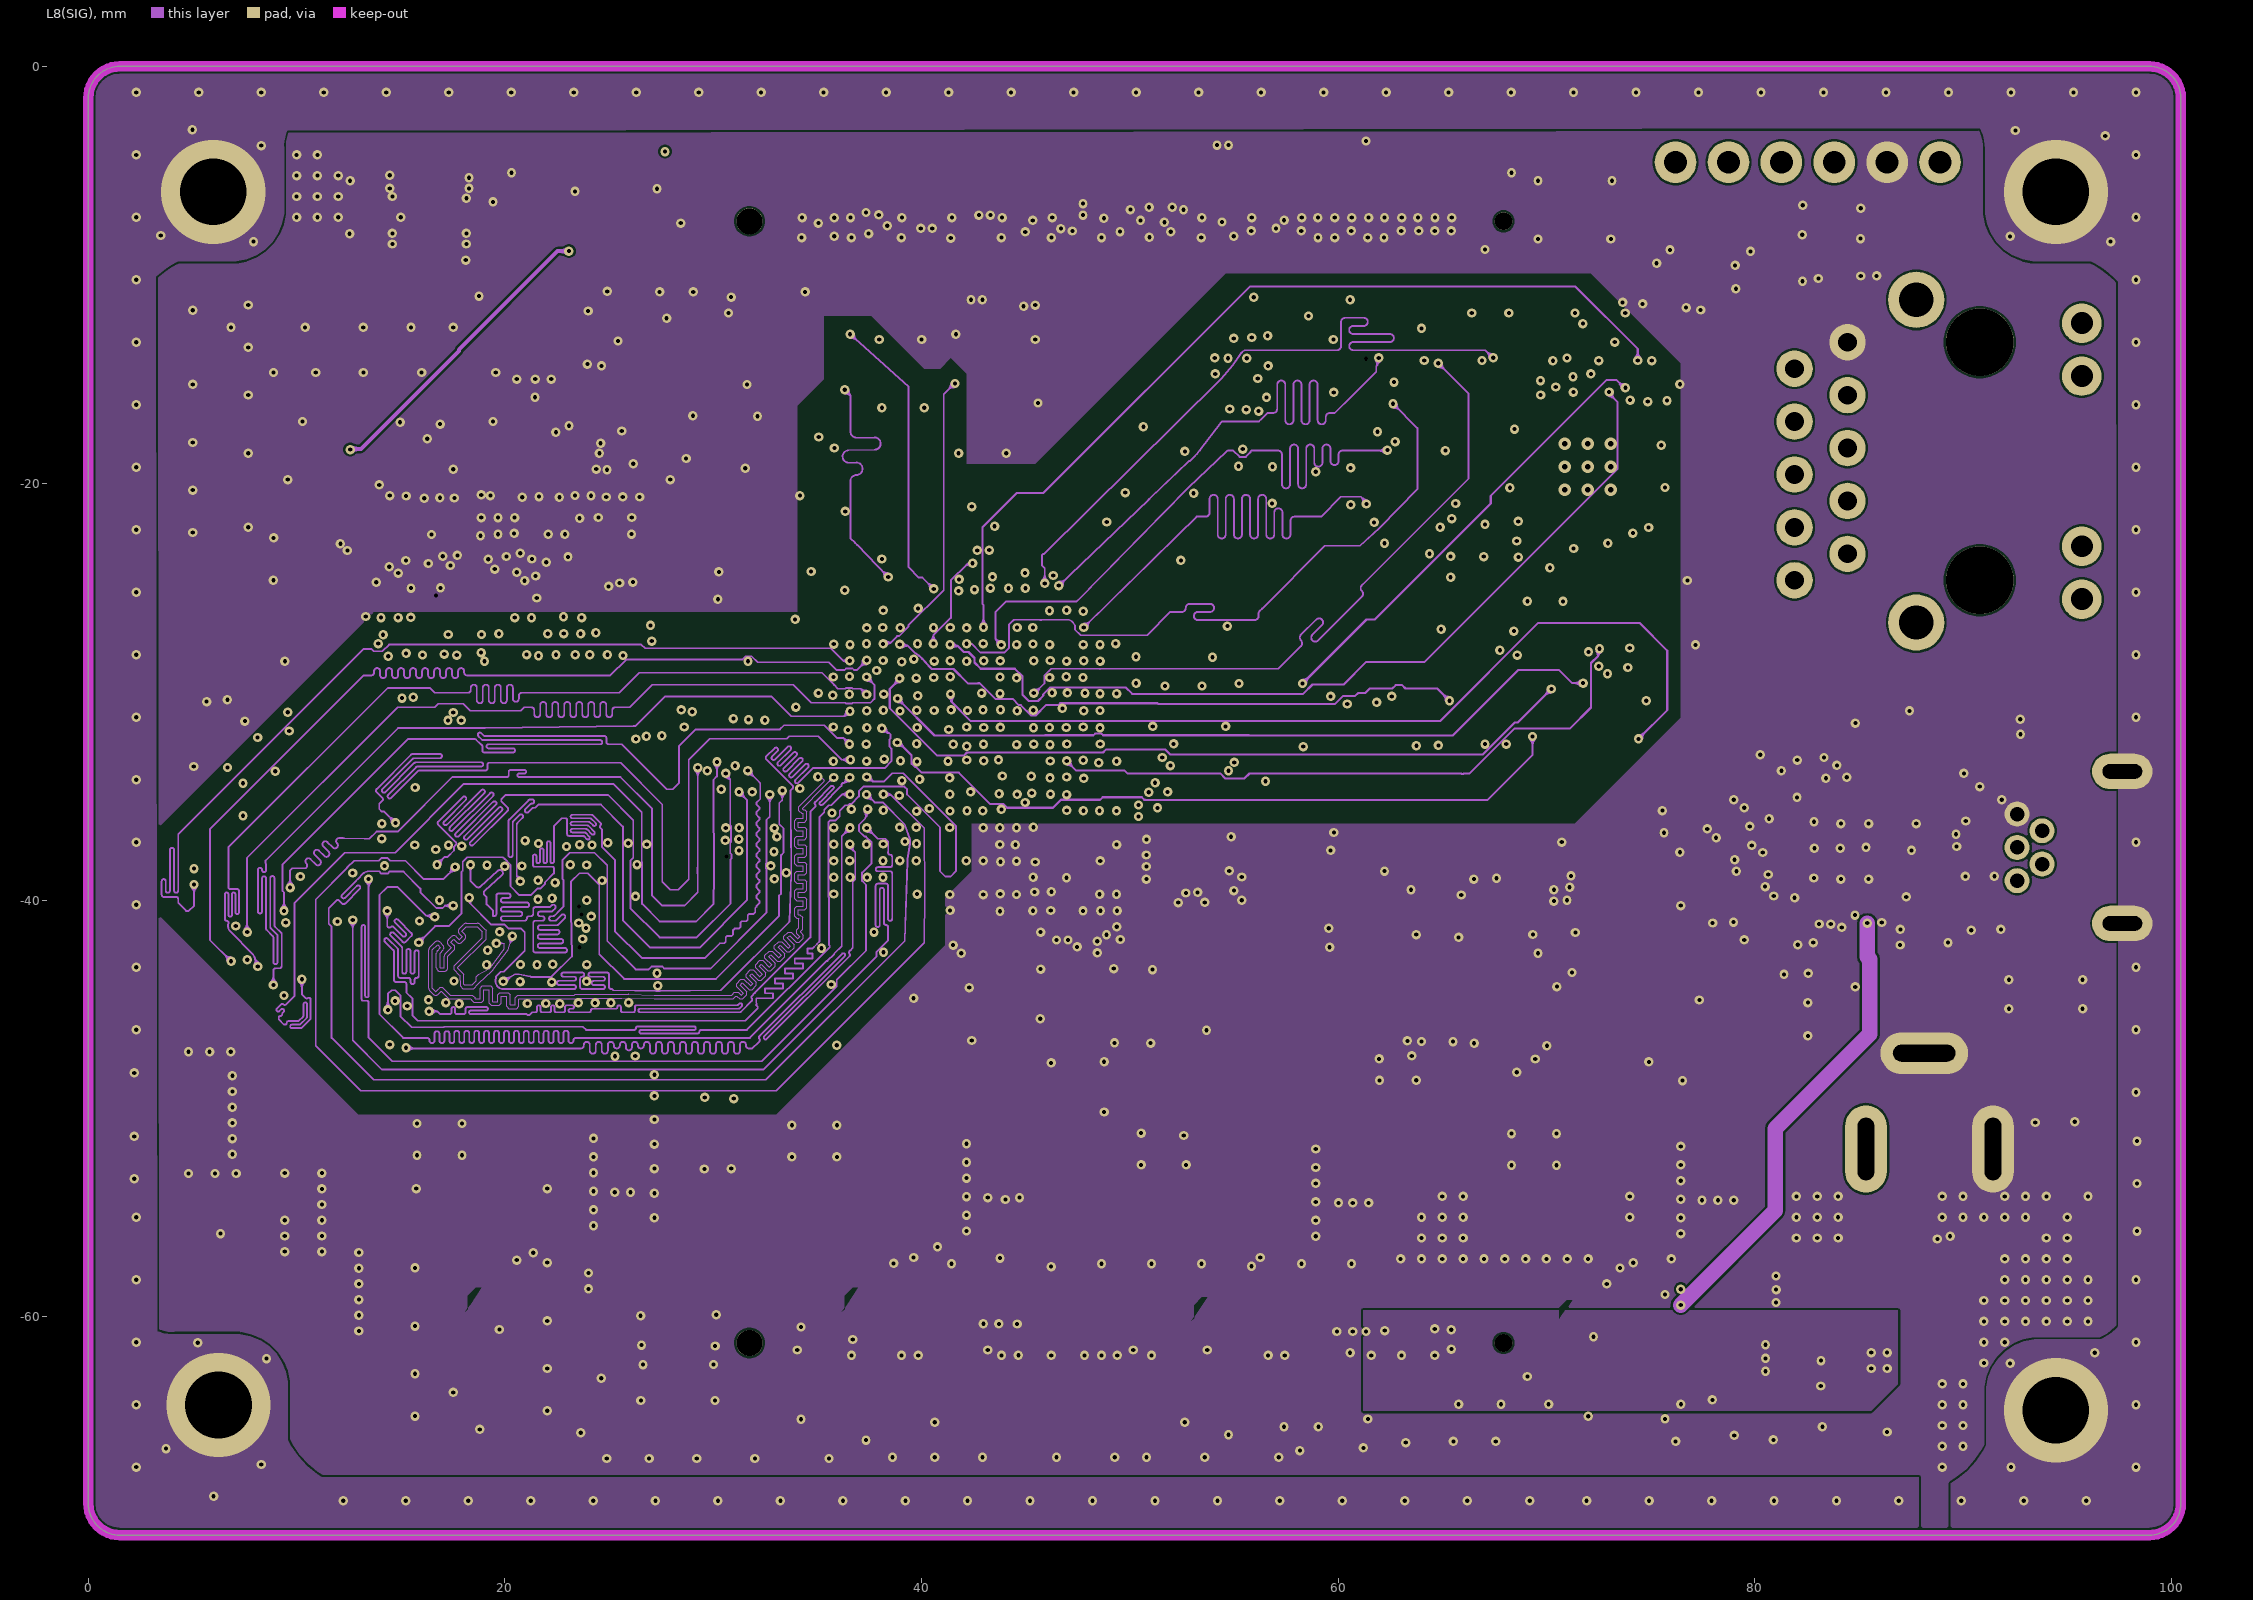
[diagram p8: L8(SIG)]
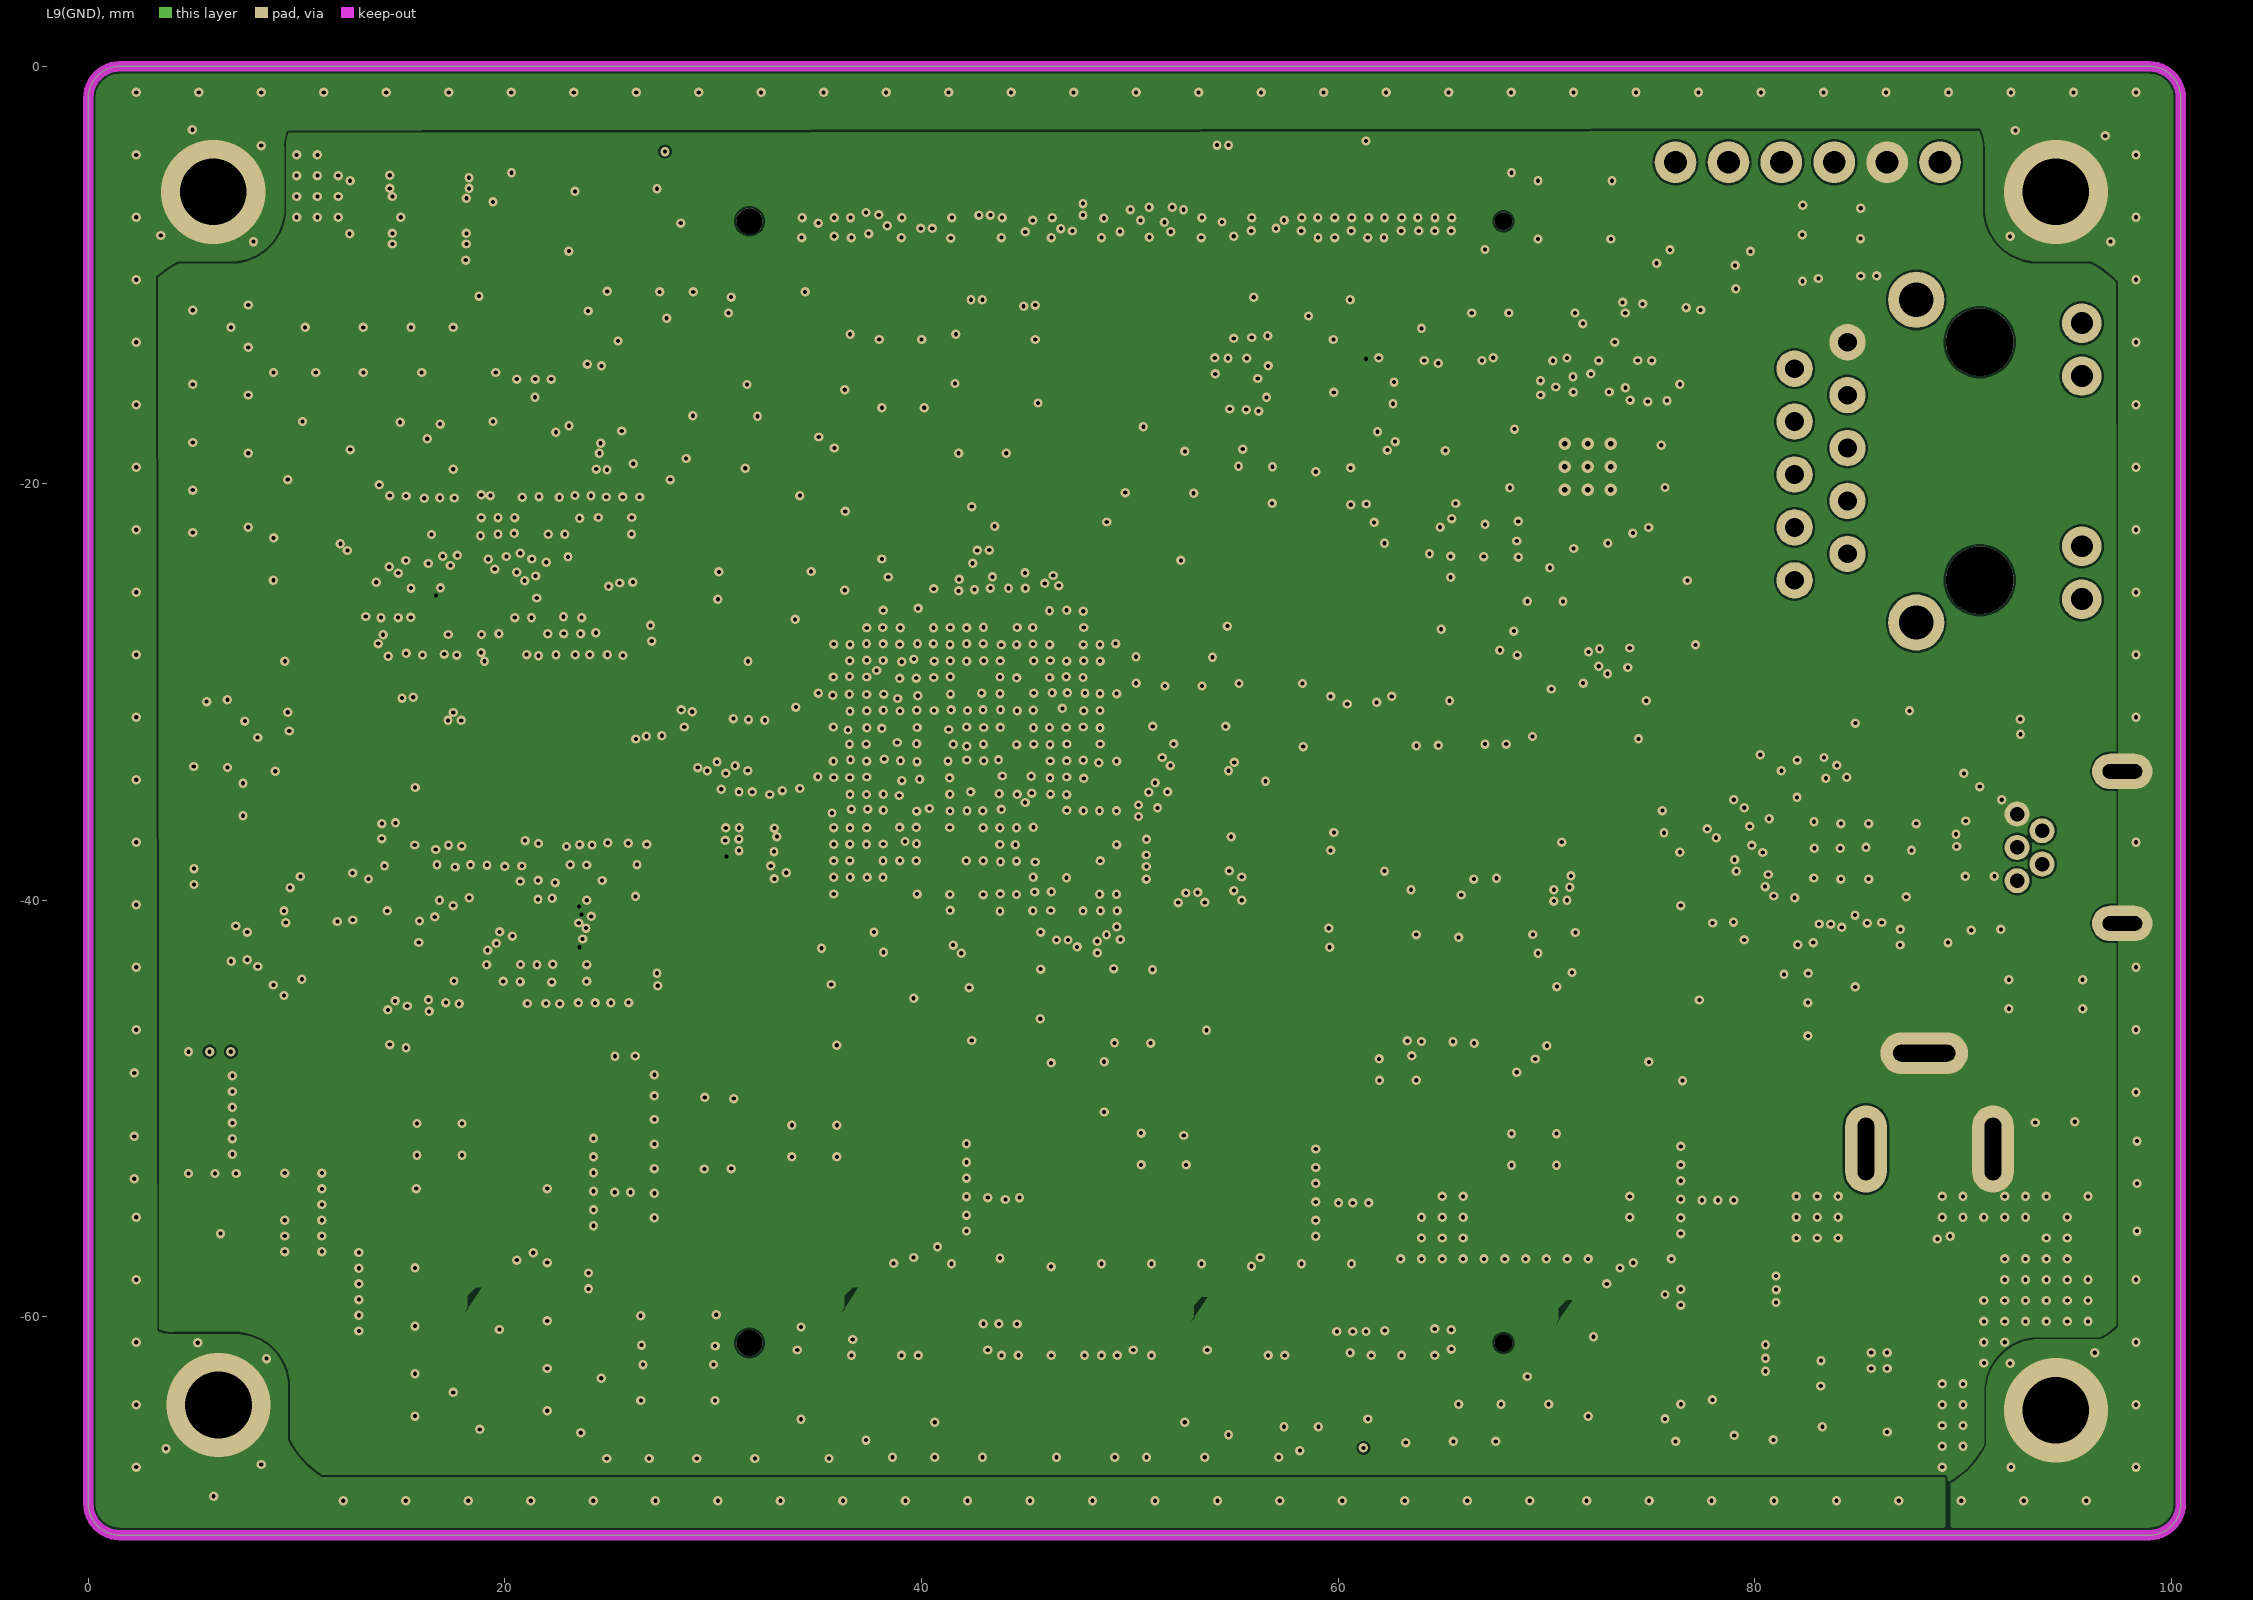
[diagram p9: L9(GND)]
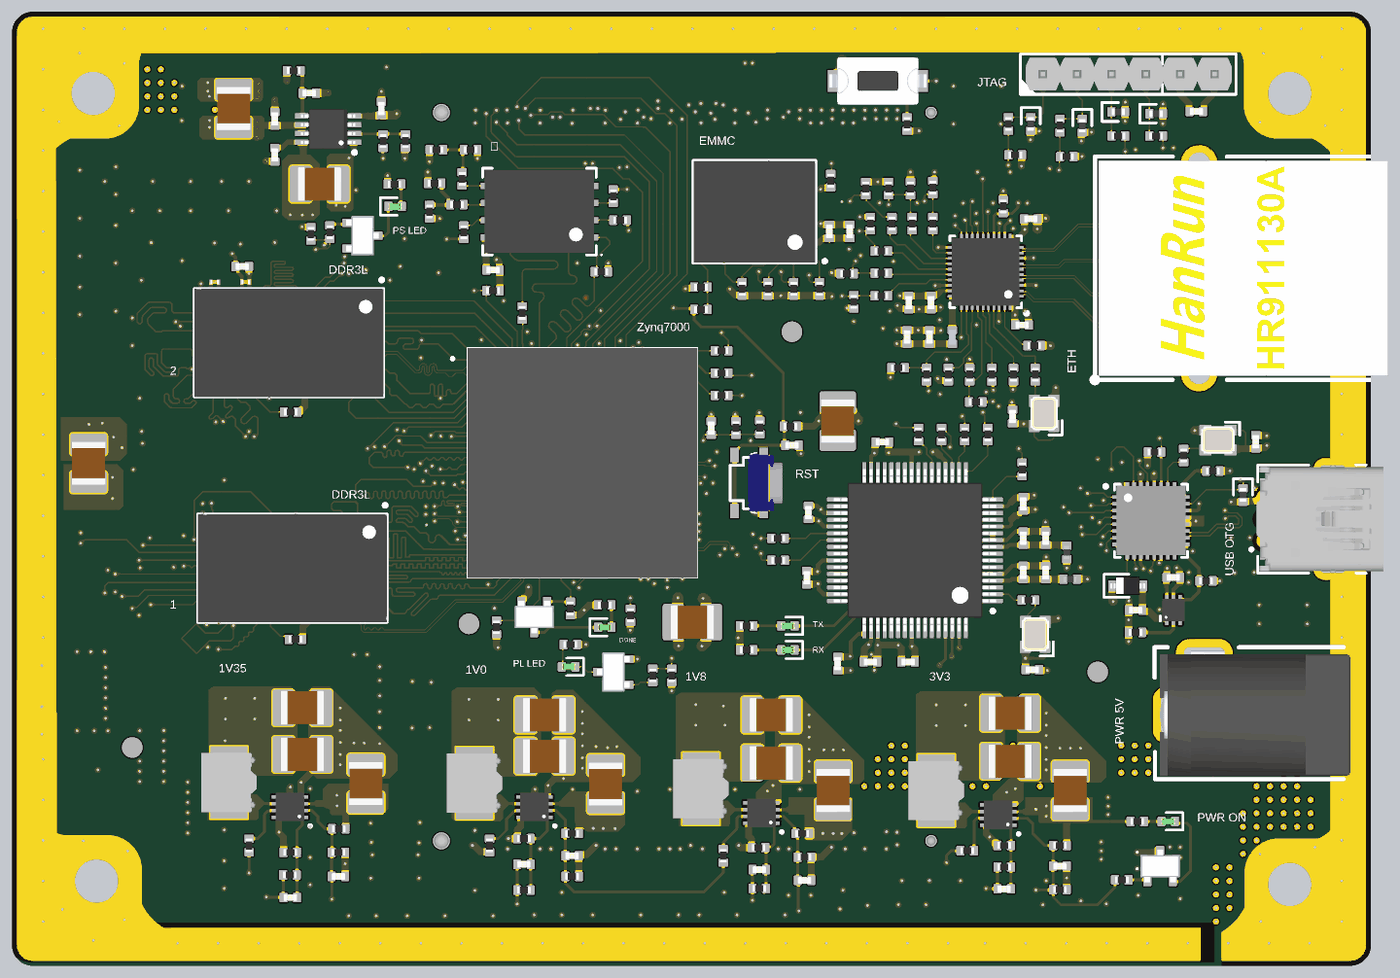
[diagram p19: 3D render of the assembled board from above, using the file's embedded part models]
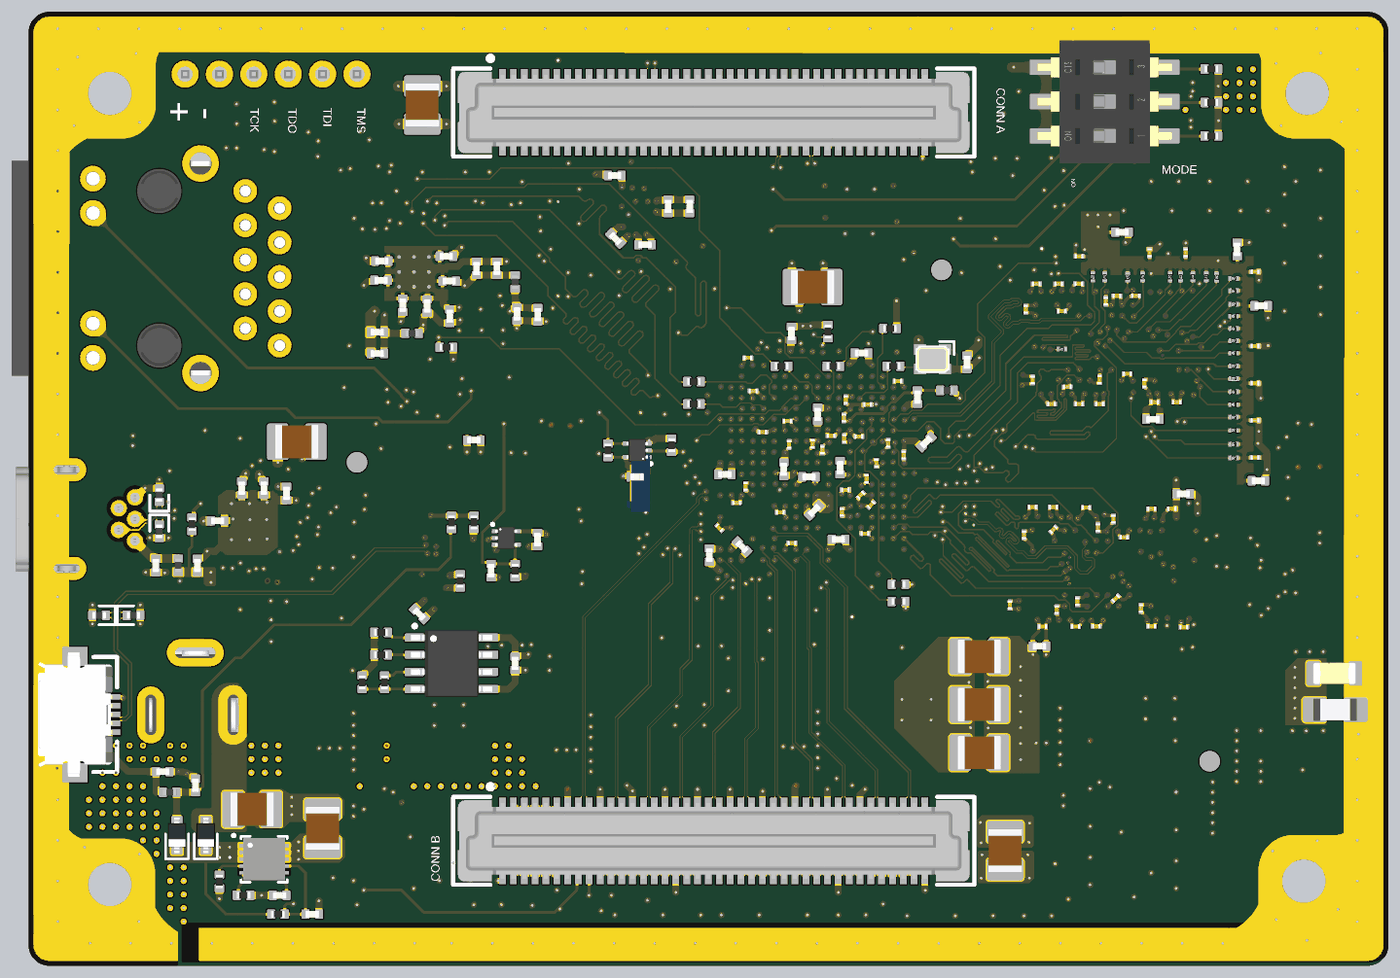
[diagram p20: 3D render of the assembled board from below, using the file's embedded part models]

## Layer stack, top to bottom
Top Solder: solder mask 0.0254, SM-002, Dk 4
L1(SIG): signal copper 0.035
PP1_1080: prepreg 0.07, PP-006, Dk 4
L2(GND): signal copper 0.035
C1: core 0.15, Core-016, Dk 4.9
L3(PWR): signal copper 0.035
PP2_1080: prepreg 0.133, PP-006, Dk 4
L4(SIG): signal copper 0.035
C2: core 0.15, Core-016, Dk 4.9
L5(GND): signal copper 0.035
PP3_1080: prepreg 0.134, PP-006, Dk 4.1
L6(SIG): signal copper 0.035
C3: core 0.15, Core-016, Dk 4.9
L7(GND): signal copper 0.035
PP4_1080: prepreg 0.133, PP-006, Dk 4
L8(SIG): signal copper 0.035
C4: core 0.15, Core-016, Dk 4.9
L9(GND): signal copper 0.035
PP5_1080: prepreg 0.07, PP-006, Dk 4
L10(SIG): signal copper 0.035
Bottom Solder: solder mask 0.0254, SM-002, Dk 4

## Board outline
0.004,-68.965 0.004,-1.947 0.004,-1.491 cw(c1.524,-1.491) 1.524,0.029 98.939,0.029 cw(c98.939,-1.491) 100.459,-1.491 100.459,-68.965 cw(c98.939,-68.965) 98.939,-70.485 1.524,-70.485 cw(c1.524,-68.965)

## Design rules (kind name [scope] priority, off if disabled: settings)
Clearance Clearance_1 [InNamedPolygon('Ground ring 4') Or InNamedPolygon('Ground ring 1') Or InNamedPolygon('ground ring 2') Or InNamedPolygon('ground ring 3')] p1: gap=0.1 ignorepadtopadclearanceinfootprint=FALSE
Clearance [All] p2: gap=0.1 ignorepadtopadclearanceinfootprint=TRUE
DiffPairsRouting DiffPairs90 [InDifferentialPairClass('90OHM')] p1: maxlimit=0.15 minlimit=0.127 mostfreqgap=0.127 toplayer_mingap=0.15 toplayer_prefgap=0.15 toplayer_minwidth=0.1 toplayer_maxwidth=0.1 toplayer_prefwidth=0.1 midlayer1_maxgap=0.127 midlayer1_minwidth=0.053 midlayer1_maxwidth=0.053 midlayer1_prefwidth=0.053 midlayer2_maxgap=0.127 midlayer2_minwidth=0.07 midlayer2_maxwidth=0.07 midlayer2_prefwidth=0.07 midlayer3_maxgap=0.127 midlayer3_minwidth=0.076 midlayer3_maxwidth=0.076 midlayer3_prefwidth=0.076 midlayer4_maxgap=0.127 midlayer4_minwidth=0.069 midlayer4_maxwidth=0.069 midlayer4_prefwidth=0.069 midlayer5_maxgap=0.127 midlayer5_minwidth=0.069 midlayer5_maxwidth=0.069 midlayer5_prefwidth=0.069 midlayer6_maxgap=0.127 midlayer6_minwidth=0.076 midlayer6_maxwidth=0.076 midlayer6_prefwidth=0.076 midlayer7_maxgap=0.127 midlayer7_minwidth=0.07 midlayer7_maxwidth=0.07 midlayer7_prefwidth=0.07 midlayer8_maxgap=0.127 midlayer8_minwidth=0.053 midlayer8_maxwidth=0.053 midlayer8_prefwidth=0.053 bottomlayer_mingap=0.15 bottomlayer_prefgap=0.15 bottomlayer_minwidth=0.1 bottomlayer_maxwidth=0.1 bottomlayer_prefwidth=0.1 impedanceprofiledriven=TRUE impedanceprofileid={41077318-767E-4AB0-BF00-270ADF34EFF2} impedanceprofilevalue=90.000000 maxuncoupledlength=12.7
DiffPairsRouting DiffPair100 [InDifferentialPairClass('100ohm')] p2: maxlimit=0.127 minlimit=0.127 mostfreqgap=0.127 toplayer_minwidth=0.069 toplayer_maxwidth=0.069 toplayer_prefwidth=0.069 midlayer1_minwidth=0.036 midlayer1_maxwidth=0.036 midlayer1_prefwidth=0.036 midlayer2_minwidth=0.047 midlayer2_maxwidth=0.047 midlayer2_prefwidth=0.047 midlayer3_minwidth=0.052 midlayer3_maxwidth=0.052 midlayer3_prefwidth=0.052 midlayer4_minwidth=0.046 midlayer4_maxwidth=0.046 midlayer4_prefwidth=0.046 midlayer5_minwidth=0.046 midlayer5_maxwidth=0.046 midlayer5_prefwidth=0.046 midlayer6_minwidth=0.052 midlayer6_maxwidth=0.052 midlayer6_prefwidth=0.052 midlayer7_minwidth=0.047 midlayer7_maxwidth=0.047 midlayer7_prefwidth=0.047 midlayer8_minwidth=0.036 midlayer8_maxwidth=0.036 midlayer8_prefwidth=0.036 bottomlayer_minwidth=0.069 bottomlayer_maxwidth=0.069 bottomlayer_prefwidth=0.069 impedanceprofiledriven=TRUE impedanceprofileid={A495C95C-94BE-4CDE-8531-08D1965A5EFA} impedanceprofilevalue=100.000000 maxuncoupledlength=12.7
HoleSize [InNet('CGND')] p1: absolutevalues=TRUE maxlimit=10 minlimit=0.025 maxpercent=80.000 minpercent=20.000
HoleToHoleClearance [All] p1: gap=0.1 allowstackedmicrovias=TRUE
MatchedLengths "EMMC xsignal" [InxSignalClass('EMMC')] p1: tolerance=25.4 checknetsindiffpair=FALSE checkdiffpairvsdiffpair=TRUE checkxsignals=TRUE checkothers=TRUE usedelayunits=TRUE delaytolerance=10.000000
MatchedLengths "Schematic Matched Net Lengths_8" [InNetClass('ULPI')] p2: tolerance=25.4 checknetsindiffpair=FALSE checkdiffpairvsdiffpair=TRUE checkxsignals=TRUE checkothers=TRUE usedelayunits=TRUE delaytolerance=10.000000
MatchedLengths MatchedLengths_6 [InxSignalClass('ETH_TX')] p3: tolerance=25.4 checknetsindiffpair=FALSE checkdiffpairvsdiffpair=TRUE checkxsignals=TRUE checkothers=TRUE usedelayunits=TRUE delaytolerance=10.000000
MatchedLengths MatchedLengths_5 [InxSignalClass('ETH_RX')] p4: tolerance=25.4 checknetsindiffpair=FALSE checkdiffpairvsdiffpair=TRUE checkxsignals=TRUE checkothers=TRUE usedelayunits=TRUE delaytolerance=10.000000
MatchedLengths MatchedLengths_4 [InNetClass('DDR_BL3')] p5: tolerance=25.4 checknetsindiffpair=FALSE checkdiffpairvsdiffpair=TRUE checkxsignals=TRUE checkothers=TRUE usedelayunits=TRUE delaytolerance=10.000000
MatchedLengths MatchedLengths_3 [InNetClass('DDR_BL2')] p6: tolerance=25.4 checknetsindiffpair=FALSE checkdiffpairvsdiffpair=TRUE checkxsignals=TRUE checkothers=TRUE usedelayunits=TRUE delaytolerance=10.000000
MatchedLengths [InNetClass('DDR_BL1')] p7: tolerance=25.4 checknetsindiffpair=FALSE checkdiffpairvsdiffpair=TRUE checkxsignals=TRUE checkothers=TRUE usedelayunits=TRUE delaytolerance=10.000000
MatchedLengths MatchedLengths_2 [InNetClass('DDR_BL0')] p8: tolerance=25.4 checknetsindiffpair=FALSE checkdiffpairvsdiffpair=TRUE checkxsignals=TRUE checkothers=TRUE usedelayunits=TRUE delaytolerance=10.000000
MatchedLengths MatchedLengths_1 [InxSignalClass('QSPI')] p9: tolerance=25.4 checknetsindiffpair=FALSE checkdiffpairvsdiffpair=TRUE checkxsignals=TRUE checkothers=TRUE usedelayunits=TRUE delaytolerance=20.000000
MatchedLengths "DIFF PAIR 100OHM WITHIN PAIR" [InDifferentialPairClass('100ohm')  or InDifferentialPairClass('90OHM')] p10: tolerance=25.4 checknetsindiffpair=TRUE checkdiffpairvsdiffpair=FALSE checkxsignals=FALSE checkothers=FALSE usedelayunits=TRUE delaytolerance=10.000000
MatchedLengths MatchedLengths_ADDR_PP2 [InxSignalClass('ADDR_PP2')] p11: tolerance=1 checknetsindiffpair=FALSE checkdiffpairvsdiffpair=TRUE checkxsignals=TRUE checkothers=TRUE usedelayunits=TRUE delaytolerance=10.000000
MatchedLengths MatchedLengths_ADDR_PP1 [InxSignalClass('ADDR_PP1')] p12: tolerance=1 checknetsindiffpair=FALSE checkdiffpairvsdiffpair=TRUE checkxsignals=TRUE checkothers=TRUE usedelayunits=TRUE delaytolerance=10.000000
MaxMinImpedance "Schematic Impedance Constraint" [InNetClass('ULPI')] p1: minimum=0.000 maximum=55.00
MinimumSolderMaskSliver [All] p1: minsoldermaskwidth=0.01
PolygonConnect PolygonConnect_4 [IsNamedPolygon('GND_L10_P052')] p1: thpad.connectstyle=Relief thpad.reliefconductorwidth=0.254 thpad.reliefentries=4 thpad.polygonreliefangle="90 Angle" thpad.airgapwidth=0.254 smdpad.connectstyle=Relief smdpad.reliefconductorwidth=0.508 smdpad.reliefentries=4 smdpad.polygonreliefangle="90 Angle" smdpad.airgapwidth=0.2 via.connectstyle=Direct via.reliefconductorwidth=0.254 via.reliefentries=4 via.polygonreliefangle="90 Angle" via.airgapwidth=0.254
PolygonConnect PolygonConnect_3 [All vs IsNamedPolygon('GND_L10_P046')] p2: thpad.connectstyle=Relief thpad.reliefconductorwidth=0.254 thpad.reliefentries=4 thpad.polygonreliefangle="90 Angle" thpad.airgapwidth=0.254 smdpad.connectstyle=Relief smdpad.reliefconductorwidth=0.254 smdpad.reliefentries=4 smdpad.polygonreliefangle="90 Angle" smdpad.airgapwidth=0.254 via.connectstyle=Direct via.reliefconductorwidth=0.254 via.reliefentries=4 via.polygonreliefangle="90 Angle" via.airgapwidth=0.254
PolygonConnect PolygonConnect_2 [HasFootprint('CAP_1210')] p3: connectstyle=Direct reliefconductorwidth=0.254 reliefentries=4 polygonreliefangle="90 Angle" airgapwidth=0.254
PolygonConnect PolygonConnect_1 [InNet('+0V675')] p4: thpad.connectstyle=Direct thpad.reliefconductorwidth=0.254 thpad.reliefentries=4 thpad.polygonreliefangle="90 Angle" thpad.airgapwidth=0.254 smdpad.connectstyle=Relief smdpad.reliefconductorwidth=0.254 smdpad.reliefentries=2 smdpad.polygonreliefangle="90 Angle" smdpad.airgapwidth=0.254 via.connectstyle=Direct via.reliefconductorwidth=0.254 via.reliefentries=4 via.polygonreliefangle="90 Angle" via.airgapwidth=0.254
PolygonConnect [All] p5: connectstyle=Direct reliefconductorwidth=0.254 reliefentries=4 polygonreliefangle="90 Angle" airgapwidth=0.254
RoutingTopology RoutingTopology_DDRAddressAndControls [InNetClass('DDR_AddressAndControls')] p1: topology=Daisy_Simple
RoutingTopology [All] p2: topology=Shortest
RoutingVias [All] p1: holewidth=0.25 width=0.5 viastyle="Through Hole" minholewidth=0.1 minwidth=0.4 maxholewidth=0.3 maxwidth=0.7
SilkToSilkClearance [All] p1: silktosilkclearance=0.1
SilkToSolderMaskClearance [IsPad] p1: minsilkscreentomaskgap=0.05 clearancetoexposedcopper=TRUE
SolderMaskExpansion [All] p1: expansion=0.102 istentingtop=FALSE
SupplyNets "Schematic Supply Nets_22" [InNet('+3V3_FTDI_PLL')] p1: voltage=0.000
SupplyNets "Schematic Supply Nets_12" [InNet('+3V3_FTDI_PHY')] p2: voltage=0.000
SupplyNets "Schematic Supply Nets_20" [InNet('+1V8_ETH')] p3: voltage=0.000
SupplyNets "Schematic Supply Nets_19" [InNet('+5V')] p4: voltage=0.000
SupplyNets "Schematic Supply Nets_18" [InNet('+1V35')] p5: voltage=0.000
SupplyNets "Schematic Supply Nets_17" [InNet('+1V0')] p6: voltage=0.000
SupplyNets "Schematic Supply Nets_16" [InNet('+0V675_Ref')] p7: voltage=0.000
SupplyNets "Schematic Supply Nets_15" [InNet('+5V_USB_AB')] p8: voltage=0.000
SupplyNets "Schematic Supply Nets_14" [InNet('+5V_USB')] p9: voltage=0.000
SupplyNets "Schematic Supply Nets_13" [InNet('+3V3_ETH')] p10: voltage=0.000
SupplyNets "Schematic Supply Nets_11" [InNet('+5V_USB_SW')] p11: voltage=0.000
SupplyNets "Schematic Supply Nets_10" [InNet('+1V8')] p12: voltage=0.000
SupplyNets "Schematic Supply Nets_9" [InNet('+1V8_PLL')] p13: voltage=0.000
SupplyNets "Schematic Supply Nets_8" [InNet('+0V675')] p14: voltage=0.000
SupplyNets "Schematic Supply Nets_7" [InNet('+VDC')] p15: voltage=0.000
SupplyNets "Schematic Supply Nets_6" [InNet('CGND')] p16: voltage=0.000
SupplyNets "Schematic Supply Nets_5" [InNet('+3V3')] p17: voltage=0.000
SupplyNets "Schematic Supply Nets_3" [InNet('+1V0_ETH')] p18: voltage=0.000
SupplyNets "Schematic Supply Nets_2" [InNet('+VCC')] p19: voltage=0.000
SupplyNets "Schematic Supply Nets_1" [InNet('GND')] p20: voltage=0.000
SupplyNets "Schematic Supply Nets" [InNet('+1V8_FTDI')] p21: voltage=0.000
Width "Schematic Width Constraint" [InNetClass('EMMC')] p1: maxlimit=0.103 minlimit=0.054 preferedwidth=0.088 toplayer_minwidth=0.103 toplayer_prefwidth=0.103 midlayer1_maxwidth=0.054 midlayer1_prefwidth=0.054 midlayer2_minwidth=0.088 midlayer2_maxwidth=0.088 midlayer2_prefwidth=0.088 midlayer3_minwidth=0.092 midlayer3_maxwidth=0.092 midlayer3_prefwidth=0.092 midlayer4_minwidth=0.088 midlayer4_maxwidth=0.088 midlayer5_minwidth=0.088 midlayer5_maxwidth=0.088 midlayer6_minwidth=0.092 midlayer6_maxwidth=0.092 midlayer6_prefwidth=0.092 midlayer7_minwidth=0.088 midlayer7_maxwidth=0.088 midlayer7_prefwidth=0.088 midlayer8_maxwidth=0.054 midlayer8_prefwidth=0.054 bottomlayer_minwidth=0.103 bottomlayer_prefwidth=0.103 impedanceprofiledriven=TRUE impedanceprofileid={535FF4C9-80D5-4DF3-A4DE-8A3D13DC5734} impedanceprofilevalue=50.000000 minimp=50.000000 maximp=50.000000 favimp=50.000000
Width Width_1 [InNetClass('L11')] p2: maxlimit=0.103 minlimit=0.054 preferedwidth=0.088 toplayer_minwidth=0.103 toplayer_prefwidth=0.103 midlayer1_maxwidth=0.054 midlayer1_prefwidth=0.054 midlayer2_minwidth=0.088 midlayer2_maxwidth=0.088 midlayer2_prefwidth=0.088 midlayer3_minwidth=0.092 midlayer3_maxwidth=0.092 midlayer3_prefwidth=0.092 midlayer4_minwidth=0.088 midlayer4_maxwidth=0.088 midlayer5_minwidth=0.088 midlayer5_maxwidth=0.088 midlayer6_minwidth=0.092 midlayer6_maxwidth=0.092 midlayer6_prefwidth=0.092 midlayer7_minwidth=0.088 midlayer7_maxwidth=0.088 midlayer7_prefwidth=0.088 midlayer8_maxwidth=0.054 midlayer8_prefwidth=0.054 bottomlayer_minwidth=0.103 bottomlayer_prefwidth=0.103 impedanceprofiledriven=TRUE impedanceprofileid={535FF4C9-80D5-4DF3-A4DE-8A3D13DC5734} impedanceprofilevalue=50.000000 minimp=50.000000 maximp=50.000000 favimp=50.000000
Width Width_3 [InNetClass('BANK34') or InNetClass('BANK35') or InNetClass('DDR_ACC') or InNetClass('DDR_BL0') or InNetClass('DDR_BL1') or InNetClass('DDR_BL2') or InNetClass('DDR_BL3') or InNetClass('ETH_MDI') or InNetClass('QSPI') or InNetClass('RGMII_RX') or InNetClass('RGMII_RX_PHY') or InNetClass('RGMII_TX_PHY') or InNetClass('ULPI')] p3: maxlimit=0.103 minlimit=0.054 preferedwidth=0.088 toplayer_minwidth=0.103 toplayer_prefwidth=0.103 midlayer1_maxwidth=0.054 midlayer1_prefwidth=0.054 midlayer2_minwidth=0.088 midlayer2_maxwidth=0.088 midlayer2_prefwidth=0.088 midlayer3_minwidth=0.092 midlayer3_maxwidth=0.092 midlayer3_prefwidth=0.092 midlayer4_minwidth=0.088 midlayer4_maxwidth=0.088 midlayer5_minwidth=0.088 midlayer5_maxwidth=0.088 midlayer6_minwidth=0.092 midlayer6_maxwidth=0.092 midlayer6_prefwidth=0.092 midlayer7_minwidth=0.088 midlayer7_maxwidth=0.088 midlayer7_prefwidth=0.088 midlayer8_maxwidth=0.054 midlayer8_prefwidth=0.054 bottomlayer_minwidth=0.103 bottomlayer_prefwidth=0.103 impedanceprofiledriven=TRUE impedanceprofileid={535FF4C9-80D5-4DF3-A4DE-8A3D13DC5734} impedanceprofilevalue=50.000000 minimp=50.000000 maximp=50.000000 favimp=50.000000
Width [All] p4: maxlimit=0.8 minlimit=0.1 preferedwidth=0.2
23 further rules are at their usual default settings.

## Classes and differential pairs
net class ULPI: USB_CLK USB_DATA0 USB_DATA1 USB_DATA2 USB_DATA3 USB_DATA4 USB_DATA5 USB_DATA6 USB_DATA7 USB_DIR USB_NXT USB_STP
net class RGMII_RX: ETH_RXCLK ETH_RXCLT ETH_RXD0 ETH_RXD1 ETH_RXD2 ETH_RXD3
net class 50OHM: DDR_DM0 DDR_DM1 DDR_DM2 DDR_DM3 DDR_DQ0 DDR_DQ1 DDR_DQ2 DDR_DQ3 DDR_DQ4 DDR_DQ5 DDR_DQ6 DDR_DQ7 DDR_DQ8 DDR_DQ9 DDR_DQ10 DDR_DQ11 DDR_DQ12 DDR_DQ13 DDR_DQ14 DDR_DQ15 DDR_DQ16 DDR_DQ17 DDR_DQ18 DDR_DQ19 DDR_DQ20 DDR_DQ21 DDR_DQ22 DDR_DQ23 DDR_DQ24 DDR_DQ25 DDR_DQ26 DDR_DQ27 DDR_DQ28 DDR_DQ29 DDR_DQ30 DDR_DQ31 DDR_DQS0_N DDR_DQS0_P DDR_DQS1_N DDR_DQS1_P DDR_DQS2_N DDR_DQS2_P DDR_DQS3_N DDR_DQS3_P DDR_NRST
net class EMMC: EMMC_CLK SD_CLK SD_CMD SD_D0 SD_D1 SD_D2 SD_D3
net class RGMII_TX_PHY: ETH_PHY_TXCLK ETH_PHY_TXCLT ETH_PHY_TXD0 ETH_PHY_TXD1 ETH_PHY_TXD2 ETH_PHY_TXD3
net class RGMII_RX_PHY: ETH_PHY_RXCLK ETH_PHY_RXCLT ETH_PHY_RXD0 ETH_PHY_RXD1 ETH_PHY_RXD2 ETH_PHY_RXD3
net class DDR_BL3: DDR_DM3 DDR_DQ24 DDR_DQ25 DDR_DQ26 DDR_DQ27 DDR_DQ28 DDR_DQ29 DDR_DQ30 DDR_DQ31 DDR_DQS3_N DDR_DQS3_P
net class DDR_BL2: DDR_DM2 DDR_DQ16 DDR_DQ17 DDR_DQ18 DDR_DQ19 DDR_DQ20 DDR_DQ21 DDR_DQ22 DDR_DQ23 DDR_DQS2_N DDR_DQS2_P
net class DDR_BL1: DDR_DM1 DDR_DQ8 DDR_DQ9 DDR_DQ10 DDR_DQ11 DDR_DQ12 DDR_DQ13 DDR_DQ14 DDR_DQ15 DDR_DQS1_N DDR_DQS1_P
net class DDR_BL0: DDR_DM0 DDR_DQ0 DDR_DQ1 DDR_DQ2 DDR_DQ3 DDR_DQ4 DDR_DQ5 DDR_DQ6 DDR_DQ7 DDR_DQS0_N DDR_DQS0_P
net class DDR_ACC: DDR_A0 DDR_A1 DDR_A2 DDR_A3 DDR_A4 DDR_A5 DDR_A6 DDR_A7 DDR_A8 DDR_A9 DDR_A10 DDR_A11 DDR_A12 DDR_A13 DDR_A14 DDR_BA0 DDR_BA1 DDR_BA2 DDR_CK_N DDR_CK_P DDR_CKE DDR_NCAS DDR_NCS DDR_NRAS DDR_NRST DDR_NWE DDR_ODT
differential pair class 100ohm: DDR_CK DDR_DQS0 DDR_DQS1 DDR_DQS2 DDR_DQS3 MDI0 MDI1 MDI2 MDI3 PL_B5_L5 PL_B34_L4 PL_B34_L7 PL_B34_L8 PL_B34_L10 PL_B34_L11 PL_B34_L14 PL_B34_L15 PL_B34_L16 PL_B34_L17 PL_B34_L18 PL_B34_L22 PL_B35_L3 PL_B35_L6 PL_B35_L7 PL_B35_L8 PL_B35_L9 PL_B35_L13 PL_B35_L14 PL_B35_L16 PL_B35_L20 PL_B35_L22 PL_B35_L23
differential pair class 90OHM: USB_FTDI_D USB_HS_D
net class RGMII_TX: ETH_TXCLK ETH_TXCLT ETH_TXD0 ETH_TXD1 ETH_TXD2 ETH_TXD3 SD_D3
net class QSPI: FLASH_CLK_M4 QSPI_CLK QSPI_DQ0_M3 QSPI_DQ1_M1 QSPI_DQ2_M2 QSPI_DQ3_M0 QSPI_NCS
net class ETH_MDI: MDI0_N MDI0_P MDI1_N MDI1_P MDI2_N MDI2_P MDI3_N MDI3_P
net class BANK35: PL_B5_L5_N PL_B5_L5_P PL_B35_IO25 PL_B35_L3_N PL_B35_L3_P PL_B35_L6_N PL_B35_L6_P PL_B35_L7_N PL_B35_L7_P PL_B35_L8_N PL_B35_L8_P PL_B35_L9_N PL_B35_L9_P PL_B35_L11_N PL_B35_L13_N PL_B35_L13_P PL_B35_L14_N PL_B35_L14_P PL_B35_L16_N PL_B35_L16_P PL_B35_L20_N PL_B35_L20_P PL_B35_L22_N PL_B35_L22_P PL_B35_L23_N PL_B35_L23_P PL_B35_L24_N
net class BANK34: PL_B34_L4_N PL_B34_L4_P PL_B34_L7_N PL_B34_L7_P PL_B34_L8_N PL_B34_L8_P PL_B34_L10_N PL_B34_L10_P PL_B34_L11_N PL_B34_L11_P PL_B34_L14_N PL_B34_L14_P PL_B34_L15_N PL_B34_L15_P PL_B34_L16_N PL_B34_L16_P PL_B34_L17_N PL_B34_L17_P PL_B34_L18_N PL_B34_L18_P PL_B34_L22_N PL_B34_L22_P
component class "Zynq programmable logic (PL)": D14 Q4 R97 R98 R99 R100
component class "Zynq processing system (PS)": C99 C100 C101 C102 C103 C104 C105 C106 C107 C108 C109 C110 C111 C112 D13 Q3 R69 R70 R71 R72 R73 R74 R75 R76 R77 R78 R79 R80 R81 R82 R83 R84 R85 R86 R87 R88 R89 R90 R91 R92 R93 R94 R95 R96 SW3 U10 U11 U12 U13 X2
component class "Zynq power and decoupling": C32 C33 C34 C35 C36 C37 C38 C39 C40 C41 C42 C43 C44 C45 C46 C47 C48 C49 C50 C51 C52 C53 C54 C55 C56 C57 C58 C59 C60 C61 C62 C63 C64 C65 C66 C67 C68 C69 C70 C71 C72 C73 C74 C75 C76 C77 C78 C79 C80 FB1 U7
component class "Zynq DDR Interface & Termination": C113 C114 C115 C116 C117 C118 C119 C120 C121 C122 C123 C124 C125 C126 R101 R102 R103 R104 R105 R106 R107 R108 R109 R110 R111 R112 R113 R114 R115 R116 R117 R118 R119 R120 R121 R122 R123 R124 R125 R126 R127 R160
component class "Zynq config, JTAG, Debug": C81 C82 C83 C84 C85 C86 C87 C88 C89 C90 C91 C92 C93 C94 C95 C96 C97 C98 D3 D4 D5 D6 D7 D8 D9 D10 D11 D12 FB2 FB3 FB4 J2 J3 Q2 R30 R31 R32 R33 R34 R35 R36 R37 R38 R39 R40 R41 R42 R43 R44 R45 R46 R47 R48 R49 R50 R51 R52 R53 R54 R55 R56 R57 R58 R59 R60 R61 R62 R63 R64 R65 R66 R67 R68 SW1 SW2 U8 U9 X1
component class "USB 2.0 High-Speed (OTG)": C191 C192 C193 C194 C195 C196 C197 C198 C199 D15 D16 D17 D18 FB7 J5 R153 R154 R155 R156 R157 R158 U17 U18 X4
component class Power_supplies: C1 C2 C3 C4 C5 C6 C7 C8 C9 C10 C11 C12 C13 C14 C15 C16 C17 C18 C19 C20 C21 C22 C23 C24 C25 C26 C27 C28 C29 C30 C31 D1 D2 J1 L1 L2 L3 L4 Q1 R1 R2 R3 R4 R5 R6 R7 R8 R9 R10 R11 R12 R13 R14 R15 R16 R17 R18 R19 R20 R21 R22 R23 R24 R25 R26 R27 R28 R29 U1 U2 U3 U4 U5 U6
component class "Mezzanine Connectors": J6 J7
component class "Gigabit Ethernet": C171 C172 C173 C174 C175 C176 C177 C178 C179 C180 C181 C182 C183 C184 C185 C186 C187 C188 C189 C190 FB5 FB6 J4 L5 R129 R130 R131 R132 R133 R134 R135 R136 R137 R138 R139 R140 R141 R142 R143 R144 R145 R146 R147 R148 R149 R150 R151 R152 U16 X3
component class "1GB DDR3L Modules": C127 C128 C129 C130 C131 C132 C133 C134 C135 C136 C137 C138 C139 C140 C141 C142 C143 C144 C145 C146 C147 C148 C149 C150 C151 C152 C153 C154 C155 C156 C157 C158 C159 C160 C161 C162 C163 C164 C165 C166 C167 C168 C169 C170 R128 R159 U14 U15
differential pair PL_B35_L23: +PL_B35_L23_P -PL_B35_L23_N
differential pair PL_B35_L22: +PL_B35_L22_P -PL_B35_L22_N
differential pair PL_B35_L20: +PL_B35_L20_P -PL_B35_L20_N
differential pair PL_B35_L16: +PL_B35_L16_P -PL_B35_L16_N
differential pair PL_B35_L14: +PL_B35_L14_P -PL_B35_L14_N
differential pair PL_B35_L13: +PL_B35_L13_P -PL_B35_L13_N
differential pair PL_B35_L9: +PL_B35_L9_P -PL_B35_L9_N
differential pair PL_B35_L8: +PL_B35_L8_P -PL_B35_L8_N
differential pair PL_B35_L7: +PL_B35_L7_P -PL_B35_L7_N
differential pair PL_B35_L6: +PL_B35_L6_P -PL_B35_L6_N
differential pair PL_B35_L3: +PL_B35_L3_P -PL_B35_L3_N
differential pair PL_B5_L5: +PL_B5_L5_P -PL_B5_L5_N
differential pair MDI1: +MDI1_P -MDI1_N
differential pair DDR_DQS3: +DDR_DQS3_P -DDR_DQS3_N
differential pair DDR_DQS2: +DDR_DQS2_P -DDR_DQS2_N
differential pair DDR_DQS1: +DDR_DQS1_P -DDR_DQS1_N
differential pair DDR_DQS0: +DDR_DQS0_P -DDR_DQS0_N
differential pair USB_HS_D: +USB_HS_D_P -USB_HS_D_N
differential pair USB_FTDI_D: +USB_FTDI_D_P -USB_FTDI_D_N
differential pair PL_B34_L22: +PL_B34_L22_P -PL_B34_L22_N
differential pair PL_B34_L18: +PL_B34_L18_P -PL_B34_L18_N
differential pair PL_B34_L17: +PL_B34_L17_P -PL_B34_L17_N
differential pair PL_B34_L16: +PL_B34_L16_P -PL_B34_L16_N
differential pair PL_B34_L15: +PL_B34_L15_P -PL_B34_L15_N
differential pair PL_B34_L14: +PL_B34_L14_P -PL_B34_L14_N
differential pair PL_B34_L11: +PL_B34_L11_P -PL_B34_L11_N
differential pair PL_B34_L10: +PL_B34_L10_P -PL_B34_L10_N
differential pair PL_B34_L8: +PL_B34_L8_P -PL_B34_L8_N
differential pair PL_B34_L7: +PL_B34_L7_P -PL_B34_L7_N
differential pair PL_B34_L4: +PL_B34_L4_P -PL_B34_L4_N
differential pair MDI3: +MDI3_P -MDI3_N
differential pair MDI2: +MDI2_P -MDI2_N
differential pair MDI0: +MDI0_P -MDI0_N
differential pair DDR_CK: +DDR_CK_P -DDR_CK_N

## Components (designator, comment, footprint, x,y, rotation, side; value= is the part's Value field where it differs from the comment)
C1 "C1210" CAP_1210 43.883,-57.06 r270 top value=22u
C2 "C0402" CAP_0402 37.846,-62.996 r180 top value=22p
C3 "C1210" CAP_1210 39.37,-54.995 r180 top value=22u
C4 "C1210" CAP_1210 39.37,-51.947 r180 top value=22u
C5 "C0402" CAP_0402 41.402,-62.361 r180 top value=100n
C6 "C1210" CAP_1210 83.947,-58.932 r0 bottom value=22u
C7 "C1210" CAP_1210 78.74,-60.332 r270 bottom value=22u
C8 "C0402" CAP_0402 79.502,-66.675 r0 bottom value=100n
C9 "C0402" CAP_0402 81.915,-65.282 r180 bottom value=100n
C10 "C1210" CAP_1210 60.706,-57.535 r270 top value=22u
C11 "C0402" CAP_0402 55.245,-63.377 r180 top value=22p
C12 "C1210" CAP_1210 56.134,-51.947 r180 top value=22u
C13 "C1210" CAP_1210 56.134,-55.503 r180 top value=22u
C14 "C0402" CAP_0402 58.585,-64.176 r180 top value=100n
C15 "C1210" CAP_1210 26.162,-57.027 r270 top value=22u
C16 "C0402" CAP_0402 20.574,-65.45 r180 top value=22p
C17 "C0402" CAP_0402 19.431,-7.878 r270 top value=4u7
C18 "C1210" CAP_1210 21.463,-54.868 r180 top value=22u
C19 "C1210" CAP_1210 21.463,-51.416 r180 top value=22u
C20 "C0402" CAP_0402 24.13,-63.885 r180 top value=100n
C21 "C1210" CAP_1210 16.383,-7.116 r270 top value=22u
C22 "C1210" CAP_1210 22.733,-12.704 r180 top value=22u
C23 "C0402" CAP_0402 19.431,-10.537 r90 top value=4u7
C24 "C0402" CAP_0402 27.305,-7.116 r270 top value=4u7
C25 "C0402" CAP_0402 21.971,-5.973 r180 top value=4u7
C26 "C1210" CAP_1210 78.232,-57.535 r270 top value=22u
C27 "C0402" CAP_0402 73.349,-64.807 r180 top value=22p
C28 "C1210" CAP_1210 73.787,-51.82 r180 top value=22u
C29 "C1210" CAP_1210 73.787,-55.376 r180 top value=22u
C30 "C0402" CAP_0402 77.47,-63.123 r180 top value=100n
C31 "C1206" CAP_1206 3.989,-48.878 r0 bottom value=1n
C32 "C0201" CAP_0201 40.236,-29.994 r270 bottom value=470n
C33 "C0402" CAP_0402 34.798,-28.452 r90 bottom value=4u7
C34 "C1210" CAP_1210 30.226,-54.741 r0 bottom value=100u
C35 "C0402" CAP_0402 42.808,-34.35 r0 bottom value=4u7
C36 "C0201" CAP_0201 44.281,-31.956 r90 bottom value=470n
C37 "C0201" CAP_0201 39.116,-31.373 r180 bottom value=470n
C38 "C0201" CAP_0201 46.939,-27.997 r180 bottom value=470n
C39 "C0201" CAP_0201 42.545,-31.904 r90 bottom value=470n
C40 "C0402" CAP_0402 42.418,-36.834 r135 bottom value=4u7
C41 "C1210" CAP_1210 61.041,-30.227 r90 top value=100u
C42 "C0201" CAP_0201 41.824,-32.351 r90 bottom value=470n
C43 "C1210" CAP_1210 30.226,-51.185 r0 bottom value=100u
C44 "C0402" CAP_0402 44.67,-33.786 r270 bottom value=4u7
C45 "C0201" CAP_0201 40.208,-31.511 r270 bottom value=470n
C46 "C0201" CAP_0201 40.386,-36.961 r90 bottom value=470n
C47 "C0201" CAP_0201 40.132,-35.31 r180 bottom value=470n
C48 "C0201" CAP_0201 41.184,-31.312 r180 bottom value=470n
C49 "C0402" CAP_0402 40.513,-33.659 r270 bottom value=4u7
C50 "C1210" CAP_1210 28.321,-61.98 r90 bottom value=100u
C51 "C1210" CAP_1210 50.292,-45.089 r180 top value=100u
C52 "C0402" CAP_0402 38.927,-25.198 r180 bottom value=4u7
C53 "C0201" CAP_0201 40.094,-28.651 r90 bottom value=470n
C54 "C0201" CAP_0201 36.963,-31.866 r90 bottom value=470n
C55 "C0201" CAP_0201 35.814,-32.736 r270 bottom value=470n
C56 "C0201" CAP_0201 36.246,-27.267 r180 bottom value=470n
C57 "C0201" CAP_0201 38.475,-29.004 r180 bottom value=470n
C58 "C0402" CAP_0402 34.136,-31.767 r135 bottom value=4u7
C59 "C1210" CAP_1210 5.662,-33.341 r90 top value=100u
C60 "C1210" CAP_1210 80.645,-31.754 r180 bottom value=100u
C61 "C0402" CAP_0402 44.102,-23.747 r270 bottom value=4u7
C62 "C0201" CAP_0201 47.324,-25.547 r180 bottom value=470n
C63 "C0201" CAP_0201 44.397,-30.219 r180 bottom value=470n
C64 "C0402" CAP_0402 42.164,-29.722 r270 bottom value=4u7
C65 "C1210" CAP_1210 30.226,-47.629 r0 bottom value=100u
C66 "C0201" CAP_0201 37.827,-33.334 r90 bottom value=470n
C67 "C1210" CAP_1210 71.374,-6.862 r90 bottom value=100u
C68 "C0402" CAP_0402 47.752,-39.501 r225 bottom value=4u7
C69 "C0402" CAP_0402 50.165,-40.136 r270 bottom value=4u7
C70 "C0201" CAP_0201 49.449,-38.128 r225 bottom value=470n
C71 "C0201" CAP_0201 44.069,-39.247 r0 bottom value=470n
C72 "C0201" CAP_0201 48.154,-36.274 r0 bottom value=470n
C73 "C0201" CAP_0201 44.931,-36.979 r0 bottom value=470n
C74 "C0201" CAP_0201 47.498,-35.056 r90 bottom value=470n
C75 "C0201" CAP_0201 38.676,-38.55 r180 bottom value=470n
C76 "C0201" CAP_0201 46.229,-31.035 r180 bottom value=470n
C77 "C0201" CAP_0201 38.555,-34.492 r270 bottom value=470n
C78 "C0402" CAP_0402 40.629,-38.97 r180 bottom value=4u7
C79 "C0402" CAP_0402 49.022,-34.167 r0 bottom value=4u7
C80 "C1210" CAP_1210 42.545,-20.324 r0 bottom value=100u
C81 "100n" CAP_0402 76.408,-38.884 r270 top
C82 "4u7" CAP_0402 74.757,-38.884 r270 top
C83 "100n" CAP_0402 74.757,-36.344 r270 top
C84 "100n" CAP_0402 58.882,-36.979 r270 top
C85 "100n" CAP_0402 71.601,-44.481 r225 bottom
C86 "100n" CAP_0402 87.559,-7.338 r0 top
C87 "4u7" CAP_0402 74.757,-41.416 r270 top
C88 "100n" CAP_0402 76.408,-41.424 r270 top
C89 "100n" CAP_0402 58.755,-41.805 r90 top
C90 "100n" CAP_0402 63.454,-48.028 r180 top
C91 "100n" CAP_0402 64.343,-31.772 r180 top
C92 "100n" CAP_0402 67.566,-31.627 r0 bottom
C93 "4u7" CAP_0402 90.551,-56.138 r0 bottom
C94 "4u7" CAP_0402 88.138,-57.154 r270 bottom
C95 "100n" CAP_0402 66.248,-48.028 r0 top
C96 "4u7" CAP_0402 61.041,-48.155 r90 top
C97 "100n" CAP_0402 64.516,-48.137 r90 bottom
C98 "100n" CAP_0402 75.422,-48.605 r180 top
C99 "100n" CAP_0402 31.137,-25.881 r90 bottom
C100 "100n" CAP_0402 62.865,-38.985 r90 bottom
C101 "100n" CAP_0402 35.56,-19.054 r0 top
C102 "100n" CAP_0402 57.658,-32.008 r0 top
C103 "100n" CAP_0402 66.294,-41.279 r270 bottom
C104 "100n" CAP_0402 51.689,-30.738 r90 top
C105 "100n" CAP_0402 57.099,-16.728 r225 bottom
C106 "4u7" CAP_0402 53.213,-14.355 r270 bottom
C107 "100n" CAP_0402 51.625,-14.355 r270 bottom
C108 "4u7" CAP_0402 57.158,-12.069 r0 bottom
C109 "4u7" CAP_0402 54.922,-17.181 r180 bottom
C110 "100n" CAP_0402 55.499,-34.35 r0 bottom
C111 "100n" CAP_0402 60.415,-16.202 r90 top
C112 "4u7" CAP_0402 61.921,-16.202 r90 top
C113 "C0201" CAP_0201 9.858,-19.185 r0 bottom value=47n
C114 "C0201" CAP_0201 17.653,-17.784 r270 bottom value=47n
C115 "C0201" CAP_0201 22.86,-18.038 r180 bottom value=47n
C116 "C0201" CAP_0201 9.858,-24.678 r0 bottom value=47n
C117 "C0201" CAP_0201 9.858,-32.917 r0 bottom value=470n
C118 "C0201" CAP_0201 9.858,-27.424 r0 bottom value=470n
C119 "C0201" CAP_0201 9.858,-30.17 r0 bottom value=470n
C120 "C0201" CAP_0201 14.986,-17.784 r270 bottom value=470n
C121 "C0402" CAP_0402 11.176,-17.53 r270 bottom value=4u7
C122 "C0402" CAP_0402 19.685,-16.26 r0 bottom value=4u7
C123 "C0402" CAP_0402 9.406,-21.705 r0 bottom value=4u7
C124 "C0402" CAP_0402 9.615,-34.635 r0 bottom value=4u7
C125 "C0201" CAP_0201 38.989,-35.691 r135 bottom value=47n
C126 "C0201" CAP_0201 38.219,-36.41 r135 bottom value=47n
C127 "C0201" CAP_0201 20.884,-21.357 r270 bottom value=47n
C128 "C0201" CAP_0201 18.034,-27.436 r90 bottom value=47n
C129 "C0402" CAP_0402 17.403,-30.089 r180 bottom value=4u7
C130 "C0201" CAP_0201 24.892,-28.96 r180 bottom value=470n
C131 "C0201" CAP_0201 18.669,-20.959 r180 bottom value=47n
C132 "C0201" CAP_0201 17.272,-19.943 r180 top value=47n
C133 "C0201" CAP_0201 15.642,-28.833 r180 bottom value=47n
C134 "C0201" CAP_0201 26.014,-20.07 r0 bottom value=47n
C135 "C0201" CAP_0201 22.86,-28.96 r0 bottom value=47n
C136 "C0201" CAP_0201 14.986,-19.943 r0 top value=47n
C137 "C0201" CAP_0201 21.336,-27.158 r90 bottom value=47n
C138 "C0201" CAP_0201 23.728,-27.69 r0 bottom value=47n
C139 "C0402" CAP_0402 17.018,-18.8 r180 top value=4u7
C140 "C0201" CAP_0201 21.336,-28.96 r180 bottom value=470n
C141 "C0201" CAP_0201 24.13,-22.102 r0 bottom value=47n
C142 "C0201" CAP_0201 22.881,-20.07 r180 bottom value=47n
C143 "C0201" CAP_0201 19.302,-26.728 r180 bottom value=47n
C144 "C0201" CAP_0201 26.289,-27.182 r90 bottom value=47n
C145 "C0201" CAP_0201 20.066,-20.959 r0 bottom value=47n
C146 "C0201" CAP_0201 24.363,-20.07 r0 bottom value=47n
C147 "C0201" CAP_0201 17.272,-28.833 r180 bottom value=47n
C148 "C0201" CAP_0201 26.797,-21.954 r90 bottom value=47n
C149 "C0201" CAP_0201 20.32,-37.469 r270 bottom value=47n
C150 "C0201" CAP_0201 18.288,-44.073 r90 bottom value=47n
C151 "C0402" CAP_0402 25.781,-46.867 r180 bottom value=4u7
C152 "C0201" CAP_0201 16.002,-36.707 r180 bottom value=470n
C153 "C0201" CAP_0201 24.507,-44.171 r270 bottom value=47n
C154 "C0201" CAP_0201 24.765,-36.58 r0 bottom value=47n
C155 "C0201" CAP_0201 21.59,-45.401 r180 bottom value=47n
C156 "C0201" CAP_0201 15.113,-45.47 r0 bottom value=47n
C157 "C0201" CAP_0201 17.505,-36.707 r180 bottom value=47n
C158 "C0201" CAP_0201 22.338,-36.609 r0 bottom value=47n
C159 "C0201" CAP_0201 24.759,-38.244 r315 bottom value=47n
C160 "C0201" CAP_0201 19.538,-38.817 r180 bottom value=47n
C161 "C0402" CAP_0402 15.155,-35.612 r0 bottom value=4u7
C162 "C0201" CAP_0201 21.463,-38.104 r270 bottom value=470n
C163 "C0201" CAP_0201 22.987,-43.565 r90 bottom value=47n
C164 "C0201" CAP_0201 20.15,-43.338 r135 bottom value=47n
C165 "C0201" CAP_0201 26.924,-38.633 r90 bottom value=47n
C166 "C0201" CAP_0201 25.552,-45.414 r180 bottom value=47n
C167 "C0201" CAP_0201 26.289,-36.58 r0 bottom value=47n
C168 "C0201" CAP_0201 17.505,-45.401 r180 bottom value=47n
C169 "C0201" CAP_0201 27.973,-43.82 r90 bottom value=47n
C170 "C0201" CAP_0201 23.114,-45.414 r0 bottom value=47n
C171 "4u7" CAP_0402 66.294,-21.467 r90 top
C172 "100n" CAP_0402 67.945,-21.467 r90 top
C173 "100n" CAP_0402 72.821,-21.659 r270 bottom
C174 "100n" CAP_0402 74.366,-18.389 r0 bottom
C175 "100n" CAP_0402 74.422,-19.816 r0 bottom
C176 "100n" CAP_0402 74.676,-23.118 r180 top
C177 "100n" CAP_0402 75.318,-15.278 r180 top
C178 "100n" CAP_0402 74.694,-25.225 r180 bottom
C179 "4u7" CAP_0402 74.694,-23.646 r180 bottom
C180 "4u7" CAP_0402 69.342,-22.475 r270 bottom
C181 "100n" CAP_0402 71.019,-21.72 r270 bottom
C182 "100n" CAP_0402 64.375,-22.3 r90 bottom
C183 "4u7" CAP_0402 62.844,-22.356 r90 bottom
C184 "4u7" CAP_0402 65.864,-18.927 r270 bottom
C185 "100n" CAP_0402 67.371,-18.939 r270 bottom
C186 "100n" CAP_0402 69.383,-19.876 r180 bottom
C187 "100n" CAP_0402 67.818,-24.007 r270 top
C188 "100n" CAP_0402 66.167,-24.007 r270 top
C189 "100n" CAP_0402 69.596,-18.038 r180 bottom
C190 "100n" CAP_0402 73.972,-29.884 r270 top
C191 "100n" CAP_0402 86.487,-37.596 r0 bottom
C192 "100n" CAP_0402 84.709,-35.183 r90 bottom
C193 "100n" CAP_0402 83.073,-35.183 r90 bottom
C194 "100n" CAP_0402 81.403,-35.564 r90 bottom
C195 "4u7" CAP_0402 87.995,-40.898 r270 bottom
C196 "4u7" CAP_0402 91.059,-40.898 r90 bottom
C197 "C0402" CAP_0402 91.948,-31.754 r270 top value=100n
C198 "C0402" CAP_0402 85.852,-41.787 r180 top value=4u7
C199 "C0402" CAP_0402 83.066,-44.2 r0 top value=4u7
D1 "D_SCHOTTKY_SOD_323" SOD-323 87.368,-60.845 r270 bottom
D2 "GREEN" LED_0402_GREEN 85.471,-59.821 r0 top
D3 "D_TVS_0402" D_0402 79.121,-8.386 r90 top
D4 "D_TVS_0402" D_0402 81.78,-7.37 r180 top
D5 "D_TVS_0402" D_0402 84.582,-7.497 r180 top
D6 "D_TVS_0402" D_0402 75.311,-8.259 r90 top
D7 "D_SCHOTTKY_SOD_323" SOD-323 89.496,-60.845 r270 bottom
D8 "GREEN" LED_0402_GREEN 43.823,-45.47 r180 top
D9 "D_TVS_0402" D_0402 92.71,-44.581 r0 bottom
D10 "D_TVS_0402" D_0402 95.25,-44.581 r180 bottom
D11 "GREEN" LED_0402_GREEN 57.358,-47.139 r0 top
D12 "GREEN" LED_0402_GREEN 57.358,-45.361 r0 top
D13 "GREEN" LED_0402_GREEN 28.321,-14.355 r180 top
D14 "GREEN" LED_0402_GREEN 41.148,-48.391 r0 top
D15 "PMEG1030EJ,115" SOD-323 82.475,-42.4 r180 top
D16 "D_TVS_0402" D_0402 90.805,-38.366 r90 bottom
D17 "D_TVS_0402" D_0402 90.805,-35.691 r270 bottom
D18 "D_TVS_0402" D_0402 91.007,-35.687 r90 top
FB1 "FB0402" FB_0402 32.615,-27.956 r180 bottom
FB2 "120R" FB_0402 77.978,-39.936 r90 top
FB3 "120R" FB_0402 78.232,-41.91 r180 top
FB4 "120R" FB_0402 90.043,-57.662 r180 bottom
FB5 "120R" FB_0402 72.128,-23.734 r0 bottom
FB6 "120R" FB_0402 64.516,-19.943 r90 bottom
FB7 "120R" FB_0402 89.408,-40.89 r90 bottom
J1 "CON-SOCJ-2155" CON-SOCJ-2155 91.44,-51.947 r90 top
J2 "Digilent HS2 Header" DIGILENT_HS2 82.55,-4.576 r90 top
J3 "USB3100-30-A" USB3100-30-A 96.424,-51.917 r270 bottom
J4 "HR911130A" HR911130A 90.805,-18.927 r270 top locked
J5 "GMSB0522132EU" GMSB0522132EU 95.123,-37.469 r90 top
J6 "10144518-082802LF" 10144518-082802LF 49.842,-7.411 r180 bottom locked
J7 "10144518-082802LF" 10144518-082802LF 49.842,-61.259 r180 bottom locked
L1 "2u2" SRP0415 34.19,-56.994 r90 top
L2 "2u2" SRP0415 50.927,-57.408 r90 top
L3 "2u2" SRP0415 16.036,-56.945 r90 top
L4 "2u2" SRP0415 68.326,-57.535 r90 top
L5 "L0402" IND_0402 69.515,-24.007 r270 top value=3u3
Q1 "2N7002NXAKR" SSM3J338R,LF-SOT23-F 84.88,-63.123 r0 top
Q2 "2N7002NXAKR" SSM3J338R,LF-SOT23-F 38.608,-44.708 r180 top
Q3 "2N7002NXAKR" SSM3J338R,LF-SOT23-F 25.908,-16.514 r270 top
Q4 "2N7002NXAKR" SSM3J338R,LF-SOT23-F 44.45,-48.772 r90 top
R1 "R0402" RES_0402 41.402,-60.71 r0 top value=12K
R2 "R0402" RES_0402 37.846,-64.901 r180 top value=68K
R3 "R0402" RES_0402 35.306,-61.599 r90 top value=12K
R4 "R0402" RES_0402 37.846,-61.091 r0 top value=100K
R5 "R0402" RES_0402 82.042,-66.675 r0 bottom value=100K
R6 "R0402" RES_0402 41.402,-63.885 r180 top value=100K
R7 "R0402" RES_0402 86.36,-64.262 r270 bottom value=12K
R8 "R0402" RES_0402 84.582,-65.282 r0 bottom value=4K7
R9 "R0402" RES_0402 58.42,-60.71 r0 top value=12K
R10 "R0402" RES_0402 55.237,-64.774 r180 top value=200K
R11 "R0402" RES_0402 52.578,-62.361 r90 top value=12K
R12 "R0402" RES_0402 55.189,-61.756 r0 top value=100K
R13 "R0402" RES_0402 58.585,-62.462 r180 top value=100K
R14 "R0402" RES_0402 24.161,-60.369 r0 top value=12K
R15 "R0402" RES_0402 20.542,-63.78 r180 top value=124K
R16 "R0402" RES_0402 17.526,-61.599 r90 top value=12K
R17 "R0402" RES_0402 27.432,-9.529 r270 top value=12K
R18 "R0402" RES_0402 20.574,-62.107 r0 top value=100K
R19 "R0402" RES_0402 24.13,-62.107 r180 top value=100K
R20 "R0402" RES_0402 20.828,-4.318 r180 top value=1K
R21 "R0402" RES_0402 29.083,-9.529 r90 top value=100K
R22 "R0402" RES_0402 83.185,-59.821 r180 top value=510R
R23 "R0402" RES_0402 73.349,-63.191 r180 top value=453K
R24 "R0402" RES_0402 77.47,-61.599 r0 top value=12K
R25 "R0402" RES_0402 70.612,-61.98 r0 top value=12K
R26 "R0402" RES_0402 82.042,-64.139 r0 top value=12K
R27 "R0402" RES_0402 73.349,-61.599 r0 top value=100K
R28 "1M" RES_1206 3.937,-51.566 r0 bottom
R29 "R0402" RES_0402 77.47,-64.86 r180 top value=100K
R30 "R0402" RES_0402 77.978,-10.672 r0 top value=4K7
R31 "R0402" RES_0402 74.168,-10.545 r0 top value=4K7
R32 "R0402" RES_0402 35.814,-45.47 r270 top value=4K7
R33 "R0402" RES_0402 66.167,-8.267 r270 top value=4K7
R34 "R0402" RES_0402 41.275,-44.073 r270 top value=4K7
R35 "R0402" RES_0402 77.47,-8.386 r270 top value=22R
R36 "R0402" RES_0402 81.788,-9.148 r0 top value=22R
R37 "R0402" RES_0402 84.582,-9.148 r0 top value=22R
R38 "R0402" RES_0402 73.66,-8.259 r270 top value=22R
R39 "R0402" RES_0402 43.815,-43.819 r0 top value=510R
R40 "R0402" RES_0402 74.676,-33.794 r90 top value=22R
R41 "R0402" RES_0402 72.136,-31.212 r90 top value=22R
R42 "R0402" RES_0402 70.427,-31.212 r90 top value=22R
R43 "R0402" RES_0402 68.719,-31.212 r90 top value=22R
R44 "R0402" RES_0402 67.01,-31.212 r90 top value=22R
R45 "R0402" RES_0402 69.217,-37.715 r270 bottom value=100k
R46 "R0402" RES_0402 67.566,-37.715 r90 bottom value=100k
R47 "R0402" RES_0402 56.634,-38.892 r180 top value=22R
R48 "R0402" RES_0402 68.58,-42.041 r90 bottom value=12K
R49 "R0402" RES_0402 56.642,-40.517 r180 top value=22R
R50 "R0402" RES_0402 75.819,-49.534 r90 bottom value=12K
R51 "R0402" RES_0402 54.31,-45.361 r0 top value=510R
R52 "R0402" RES_0402 54.31,-47.139 r0 top value=510R
R53 "R0402" RES_0402 74.168,-49.534 r270 bottom value=2K49
R54 "R0402" RES_0402 74.422,-47.502 r0 bottom value=12K
R55 "R0402" RES_0402 74.422,-45.851 r0 bottom value=12K
R56 "R0402" RES_0402 31.369,-10.164 r0 top value=DNP_0R
R57 "R0402" RES_0402 30.861,-14.736 r90 top value=DNP_0R
R58 "R0402" RES_0402 33.274,-12.323 r90 top value=20K
R59 "R0402" RES_0402 32.893,-14.228 r180 top value=20K
R60 "R0402" RES_0402 33.899,-10.164 r0 top value=1k
R61 "R0402" RES_0402 31.242,-12.65 r180 top value=1k
R62 "R0402" RES_0402 75.138,-43.456 r180 top value=22R
R63 "R0402" RES_0402 33.401,-16.26 r270 top value=20K
R64 "R0402" RES_0402 44.958,-15.371 r0 top value=20K
R65 "R0402" RES_0402 44.45,-13.593 r90 top value=20K
R66 "R0402" RES_0402 13.081,-4.195 r180 bottom value=1k
R67 "R0402" RES_0402 13.081,-6.671 r180 bottom value=1k
R68 "R0402" RES_0402 13.081,-9.148 r180 bottom value=1k
R69 "R0402" RES_0402 43.561,-19.181 r0 top value=12K
R70 "R0402" RES_0402 64.516,-41.279 r270 bottom value=4K7
R71 "R0402" RES_0402 36.568,-26.166 r180 bottom value=22R
R72 "R0402" RES_0402 55.288,-30.696 r90 top value=12K
R73 "R0402" RES_0402 57.539,-30.611 r0 top value=12K
R74 "R0402" RES_0402 37.719,-22.229 r270 top value=22R
R75 "R0402" RES_0402 53.514,-30.738 r270 top value=12K
R76 "R0402" RES_0402 41.417,-23.61 r270 bottom value=20K
R77 "R0402" RES_0402 36.83,-23.372 r0 bottom value=20K
R78 "R0402" RES_0402 28.272,-12.704 r0 top value=510R
R79 "R0402" RES_0402 52.451,-26.674 r180 top value=22R
R80 "R0402" RES_0402 51.308,-27.309 r180 bottom value=22R
R81 "R0402" RES_0402 52.451,-28.325 r180 top value=22R
R82 "R0402" RES_0402 23.495,-16.26 r270 top value=12K
R83 "R0402" RES_0402 44.836,-26.166 r180 bottom value=22R
R84 "R0402" RES_0402 52.451,-25.023 r180 top value=22R
R85 "R0402" RES_0402 51.308,-28.96 r180 bottom value=22R
R86 "R0402" RES_0402 57.785,-20.451 r90 top value=68K
R87 "R0402" RES_0402 55.88,-20.451 r90 top value=68K
R88 "R0402" RES_0402 53.975,-20.451 r90 top value=68K
R89 "R0402" RES_0402 59.69,-20.451 r90 top value=68K
R90 "R0402" RES_0402 60.522,-12.45 r90 top value=12K
R91 "R0402" RES_0402 50.927,-20.324 r0 top value=12K
R92 "R0402" RES_0402 22.098,-16.387 r90 top value=100K
R93 "R0402" RES_0402 57.658,-32.389 r270 bottom value=12K
R94 "R0402" RES_0402 41.013,-26.166 r0 bottom value=22R
R95 "R0402" RES_0402 50.927,-21.975 r180 top value=0R
R96 "R0402" RES_0402 52.959,-32.008 r90 bottom value=100K
R97 "R0402" RES_0402 41.275,-46.74 r180 top value=510R
R98 "R0402" RES_0402 45.72,-44.581 r90 top value=1k
R99 "R0402" RES_0402 47.371,-49.026 r90 top value=12K
R100 "R0402" RES_0402 48.768,-49.026 r270 top value=100K
R101 "R0201" RES_0201 24.13,-24.896 r180 bottom value=100R
R102 "R0201" RES_0201 11.433,-30.916 r180 bottom value=49R9
R103 "R0201" RES_0201 21.844,-19.562 r90 bottom value=49R9
R104 "R0201" RES_0201 16.129,-19.562 r90 bottom value=49R9
R105 "R0201" RES_0201 11.433,-19.691 r180 bottom value=49R9
R106 "R0201" RES_0201 18.161,-19.562 r90 bottom value=49R9
R107 "R0201" RES_0201 20.955,-19.562 r90 bottom value=49R9
R108 "R0201" RES_0201 11.433,-32.948 r180 bottom value=49R9
R109 "R0201" RES_0201 15.367,-19.562 r90 bottom value=49R9
R110 "R0201" RES_0201 12.7,-19.583 r90 bottom value=49R9
R111 "R0201" RES_0201 11.433,-24.297 r180 bottom value=49R9
R112 "R0201" RES_0201 11.433,-25.204 r180 bottom value=49R9
R113 "R0201" RES_0201 14.451,-19.562 r90 bottom value=49R9
R114 "R0201" RES_0201 11.433,-31.932 r180 bottom value=49R9
R115 "R0201" RES_0201 11.433,-26.166 r180 bottom value=49R9
R116 "R0201" RES_0201 11.433,-29.925 r180 bottom value=49R9
R117 "R0201" RES_0201 13.462,-19.562 r90 bottom value=49R9
R118 "R0201" RES_0201 11.433,-29.015 r180 bottom value=49R9
R119 "R0201" RES_0201 11.433,-20.578 r180 bottom value=49R9
R120 "R0201" RES_0201 11.433,-23.376 r180 bottom value=49R9
R121 "R0201" RES_0201 11.433,-28.047 r180 bottom value=49R9
R122 "R0201" RES_0201 11.433,-21.592 r180 bottom value=49R9
R123 "R0201" RES_0201 11.433,-22.472 r180 bottom value=49R9
R124 "R0201" RES_0201 11.433,-27.101 r180 bottom value=49R9
R125 "R0402" RES_0402 35.56,-20.578 r0 top value=4K7
R126 "R0402" RES_0402 36.195,-43.565 r0 bottom value=100R
R127 "R0402" RES_0402 36.195,-42.295 r180 bottom value=100R
R128 "R0402" RES_0402 20.607,-29.556 r0 top value=240R
R129 "R0402" RES_0402 63.459,-15.625 r90 top value=4K7
R130 "R0402" RES_0402 63.119,-13.031 r90 top value=4K7
R131 "R0402" RES_0402 64.793,-13.031 r90 top value=DNP_4K7
R132 "R0402" RES_0402 68.072,-12.966 r90 top value=4K7
R133 "R0402" RES_0402 64.262,-17.657 r180 top value=22R
R134 "R0402" RES_0402 65.047,-15.625 r90 top value=22R
R135 "R0402" RES_0402 66.548,-15.625 r90 top value=22R
R136 "R0402" RES_0402 68.072,-15.625 r90 top value=22R
R137 "R0402" RES_0402 64.262,-19.282 r180 top value=22R
R138 "R0402" RES_0402 64.262,-20.959 r180 top value=22R
R139 "R0402" RES_0402 61.732,-19.324 r0 top value=1k
R140 "R0402" RES_0402 62.231,-21.409 r90 top value=1k
R141 "R0402" RES_0402 66.421,-13.031 r270 top value=1k
R142 "R0402" RES_0402 69.596,-24.769 r180 bottom value=1k
R143 "R0402" RES_0402 73.279,-14.355 r90 top value=1k
R144 "R0402" RES_0402 65.497,-26.284 r0 top value=4K7
R145 "R0402" RES_0402 70.797,-26.792 r270 top value=4K7
R146 "R0402" RES_0402 75.646,-26.792 r270 top value=22R
R147 "R0402" RES_0402 74.039,-26.792 r270 top value=22R
R148 "R0402" RES_0402 67.61,-26.792 r90 top value=510R
R149 "R0402" RES_0402 72.431,-26.792 r270 top value=22R
R150 "R0402" RES_0402 75.565,-24.642 r0 top value=4K7
R151 "R0402" RES_0402 69.217,-26.792 r270 top value=4K7
R152 "R0402" RES_0402 71.247,-28.806 r180 top value=510R
R153 "R0402" RES_0402 88.392,-37.85 r270 bottom value=12K
R154 "R0402" RES_0402 84.455,-32.516 r0 top value=1k
R155 "R0402" RES_0402 88.773,-33.913 r0 top value=8K06
R156 "R0402" RES_0402 86.614,-32.77 r90 top value=22R
R157 "R0402" RES_0402 83.058,-45.851 r180 top value=510R
R158 "R0402" RES_0402 88.265,-42.041 r0 top value=4K7
R159 "R0402" RES_0402 20.955,-46.359 r0 top value=240R
R160 "R0201" RES_0201 19.263,-19.583 r90 bottom value=49R9
SW1 "DTSM-3" DTSM-3 64.008,-5.08 r180 top
SW2 "219-3LPST" 219-3LPST 20.968,-6.608 r90 bottom
SW3 "SKRPANE010" SKRPANE010 54.483,-34.802 r270 top
U1 "SY8003ADFC" DFN2x2-8 38.625,-58.754 r180 top
U2 "LS1205EVD33" DFN3x3_10L 83.058,-62.615 r180 bottom
U3 "SY8003ADFC" DFN2x2-8 55.399,-59.199 r180 top
U4 "SY8003ADFC" DFN2x2-8 20.542,-58.754 r180 top
U5 "BD3539FVM-TR" MSOP8 23.368,-8.64 r180 top locked
U6 "SY8003ADFC" DFN2x2-8 72.912,-59.347 r180 top
U7 "XC7Z010-2CLG400I" BGA400C80P20X20_1700X1700X160N 42.17,-33.31 r0 top locked
U8 "FT2232HL-REEL" LQFP-64-0.5mm 66.756,-39.773 r180 top locked
U9 "93LC56BT-I/SN" SOIC-8 69.215,-48.137 r180 bottom
U10 "W25Q128JVEIQ" WSON-8-8X6 38.989,-14.736 r180 top locked
U11 "SN74LVC1G07DRLR" SOT-5 65.173,-38.866 r180 bottom
U12 "S40FC004C1B2I00000" VFBGA153-9.0x7.5x0.8 54.884,-14.756 r180 top locked
U13 "SN74LVC1G07DRLR" SOT-5 55.499,-32.389 r0 bottom
U14 "MT41K256M16TW-107 IT:P" MICT-TW-96 20.479,-24.439 r270 top locked
U15 "MT41K256M16TW-107 IT:P" MICT-TW-96 20.733,-41.101 r270 top locked
U16 "RTL8211F-CG" QFN-40-0.4-EP 71.986,-19.195 r180 top locked
U17 "USB3320C-EZK-TR" QFN-32-5x5x0.85mm 84.201,-37.596 r0 top locked
U18 "MIC2099-1YMT-TR" TMLF-6-1_6X1_6 85.86,-44.178 r90 top
X1 "ECS-2520MV-130-BN-TR" XTAL_2520 75.646,-45.996 r90 top
X2 "ECS-2520MV-333.3-BN-TR" XTAL_2520 33.691,-25.658 r0 bottom
X3 "ECS-2520MV-250-BN-TR" XTAL_2520 76.299,-29.651 r90 top
X4 "ECS-2520MV-130-BN-TR" XTAL_2520 89.154,-31.627 r180 top

## Footprints (in the part's own frame and the unit in brackets; to place one, negate y for a bottom-side part, rotate by r counter-clockwise, add the part's x,y. Pads: shape width x height; smd on the part's side, far side on the other; paste and mask are expansions set on the pad)
219-3LPST [mm]
  rrect10% 1.13x2.44 smd mask+0: 1(-2.54,-4.305) 2(0,-4.305) 3(2.54,-4.305) 4(2.54,4.305) 5(0,4.305) 6(-2.54,4.305)
  silkscreen extent -3.03,-2.39 2.97,2.36, body extent -4.54,-4.95 4.54,4.96, height 4.31
10144518-082802LF [mm]
  rect 0.5x2 smd: 1(-15.6,2.2) 2(-15.6,-2.2) 3(-14.8,2.2) 4(-14.8,-2.2) 5(-14,2.2) 6(-14,-2.2) 7(-13.2,2.2) 8(-13.2,-2.2) 9(-12.4,2.2) 10(-12.4,-2.2) 11(-11.6,2.2) 12(-11.6,-2.2) 13(-10.8,2.2) 14(-10.8,-2.2) 15(-10,2.2) 16(-10,-2.2) 17(-9.2,2.2) 18(-9.2,-2.2) 19(-8.4,2.2) 20(-8.4,-2.2) 21(-7.6,2.2) 22(-7.6,-2.2) 23(-6.8,2.2) 24(-6.8,-2.2) 25(-6,2.2) 26(-6,-2.2) 27(-5.2,2.2) 28(-5.2,-2.2) 29(-4.4,2.2) 30(-4.4,-2.2) 31(-3.6,2.2) 32(-3.6,-2.2) 33(-2.8,2.2) 34(-2.8,-2.2) 35(-2,2.2) 36(-2,-2.2) 37(-1.2,2.2) 38(-1.2,-2.2) 39(-0.4,2.2) 40(-0.4,-2.2) 41(0.4,2.2) 42(0.4,-2.2) 43(1.2,2.2) 44(1.2,-2.2) 45(2,2.2) 46(2,-2.2) 47(2.8,2.2) 48(2.8,-2.2) 49(3.6,2.2) 50(3.6,-2.2) 51(4.4,2.2) 52(4.4,-2.2) 53(5.2,2.2) 54(5.2,-2.2) 55(6,2.2) 56(6,-2.2) 57(6.8,2.2) 58(6.8,-2.2) 59(7.6,2.2) 60(7.6,-2.2) 61(8.4,2.2) 62(8.4,-2.2) 63(9.2,2.2) 64(9.2,-2.2) 65(10,2.2) 66(10,-2.2) 67(10.8,2.2) 68(10.8,-2.2) 69(11.6,2.2) 70(11.6,-2.2) 71(12.4,2.2) 72(12.4,-2.2) 73(13.2,2.2) 74(13.2,-2.2) 75(14,2.2) 76(14,-2.2) 77(14.8,2.2) 78(14.8,-2.2) 79(15.6,2.2) 80(15.6,-2.2)
  round 0.85 hole 0.85 unplated: MH(-18.1,0)
  round 1.25 hole 1.25 unplated: MH(18.1,0)
  silkscreen extent -19.25,-3.25 19.25,4.15, body extent -18.9,-3 18.9,3, height 5.71